# Altium PCB EVB_CBDM_AK376xE_V1.0.1.PcbDoc (part 1 of 2)
Units mil, origin at the board's own origin, x right, y up, seen from the top; angles counter-clockwise.
Board outline 1970 x 2130.01 mil, 4 copper layers (Top, Inner Layer 2, Inner Layer 3, Bottom), stack 35.4 mil thick; 161 components, 161 nets, 664 pads, 636 vias.
Unrouted connection lines stored in the file: 412.
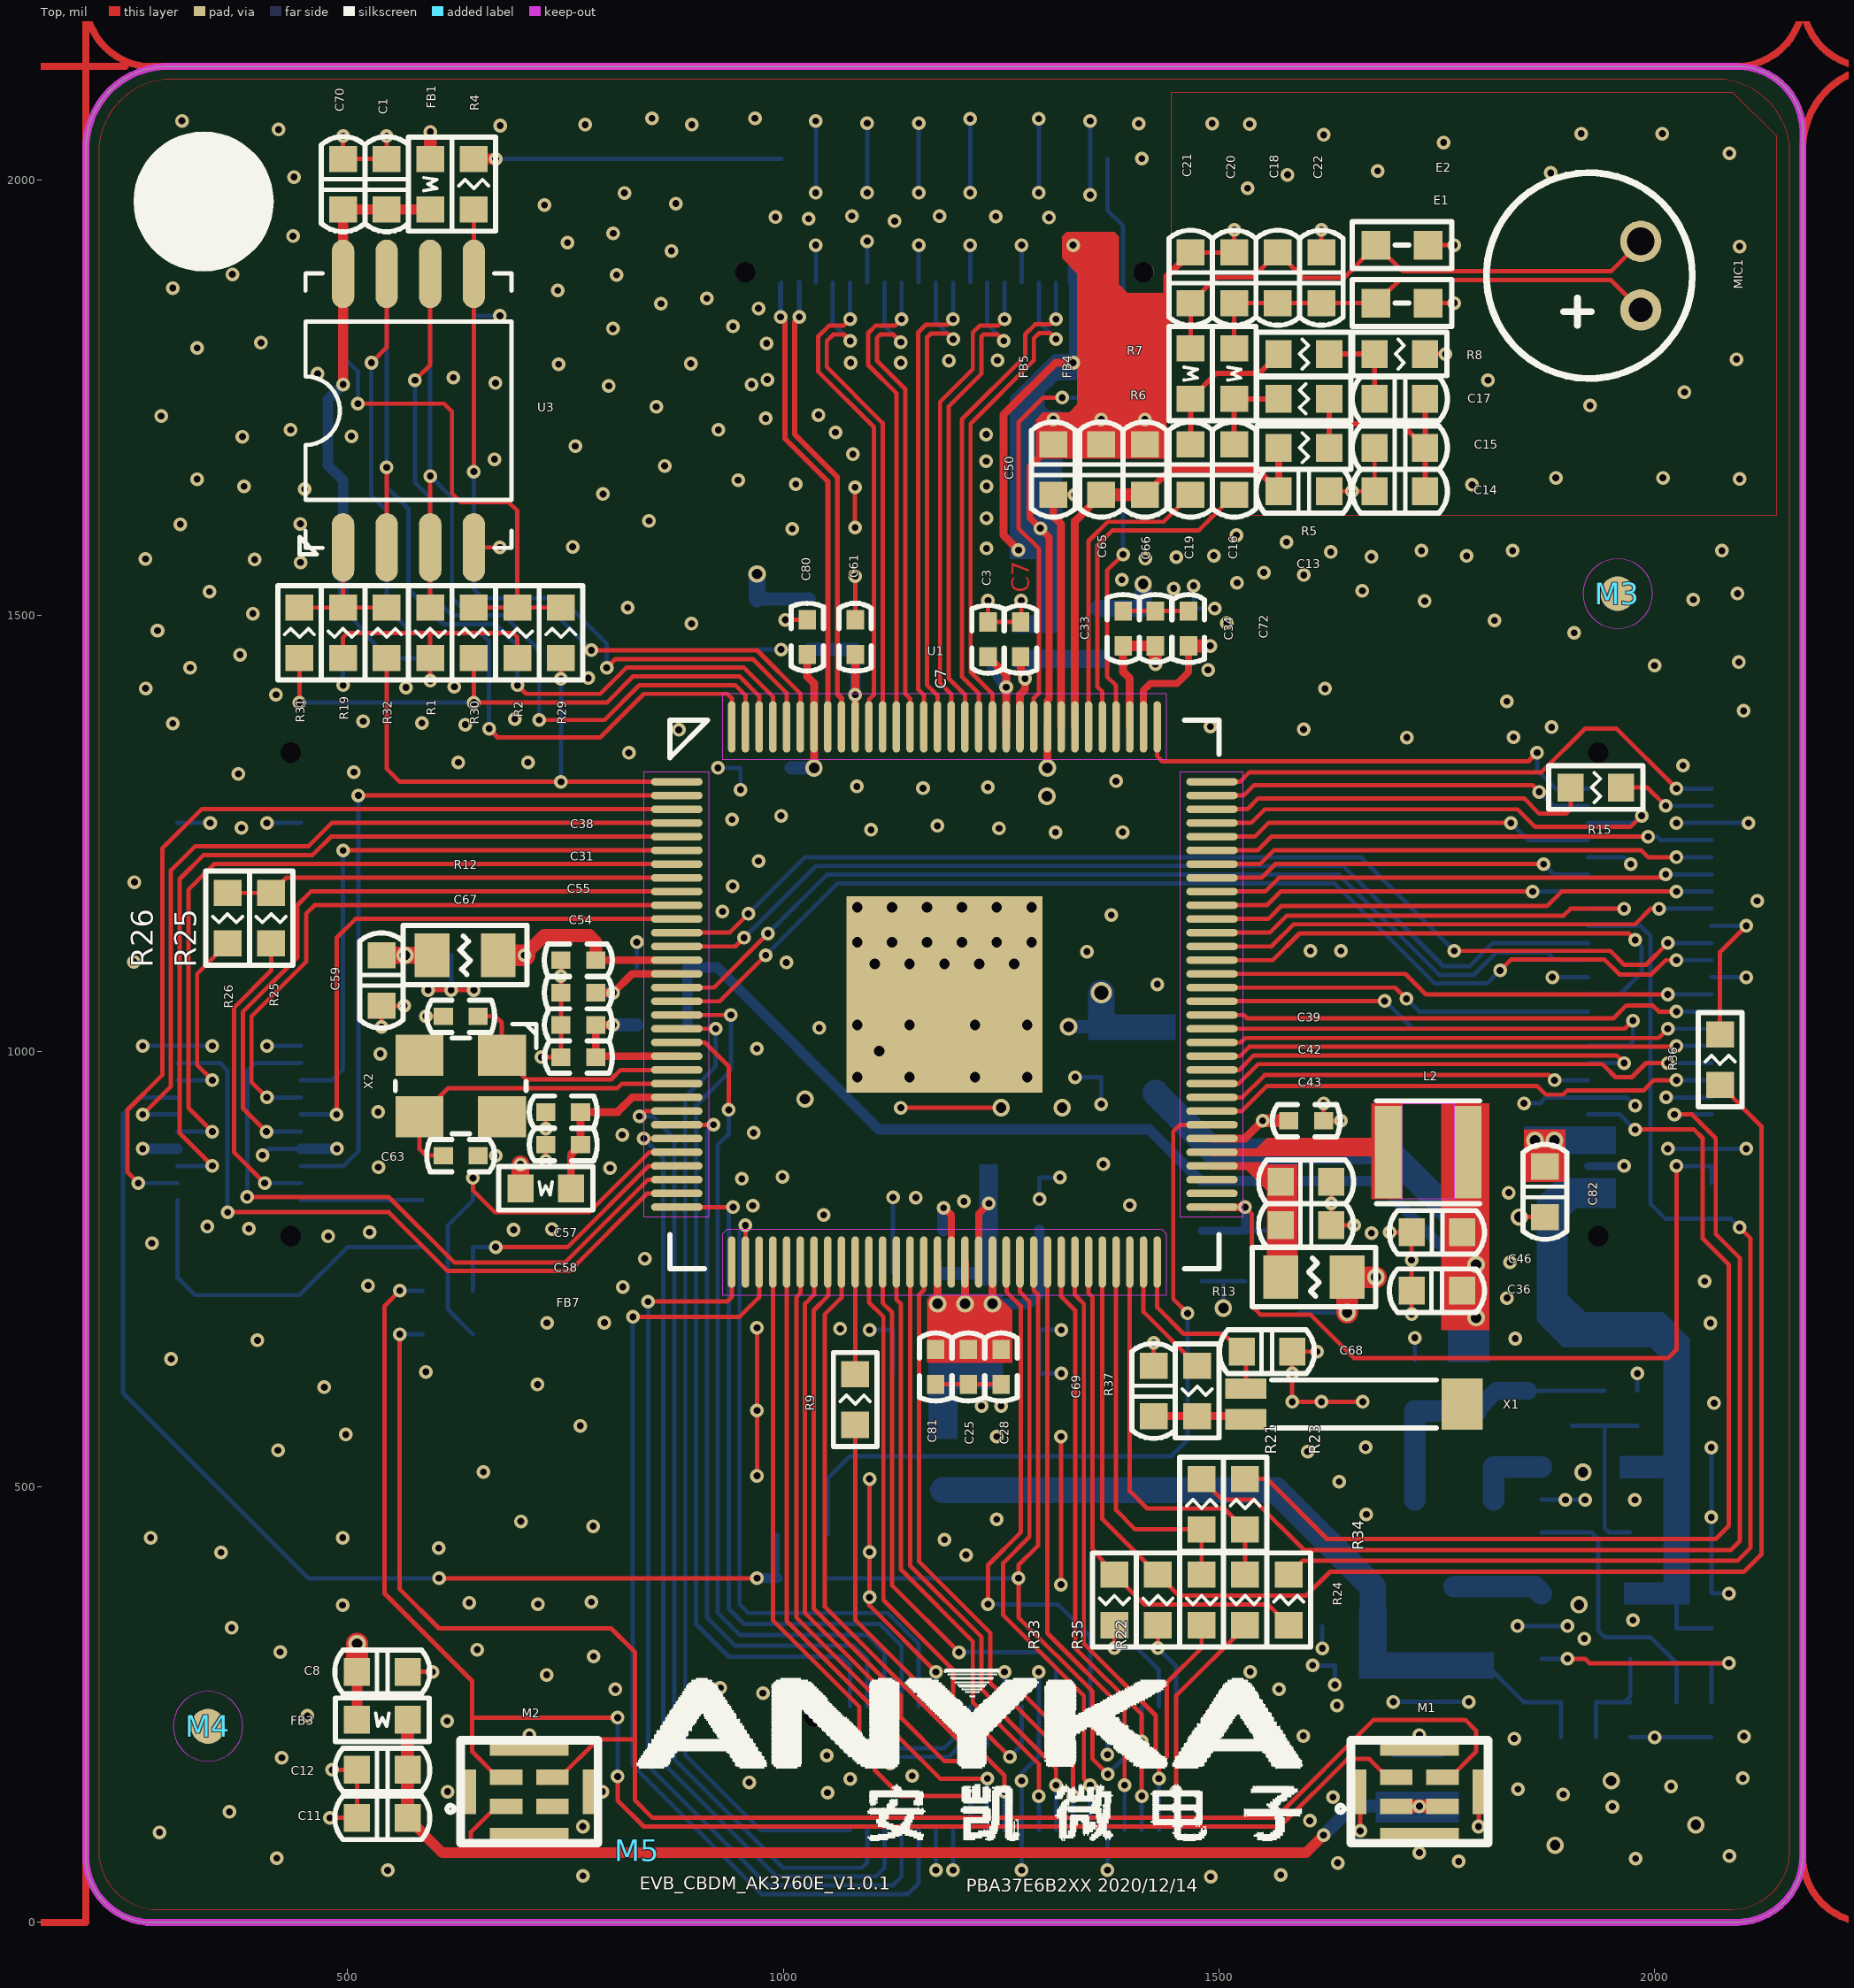
[diagram p0: Top view]
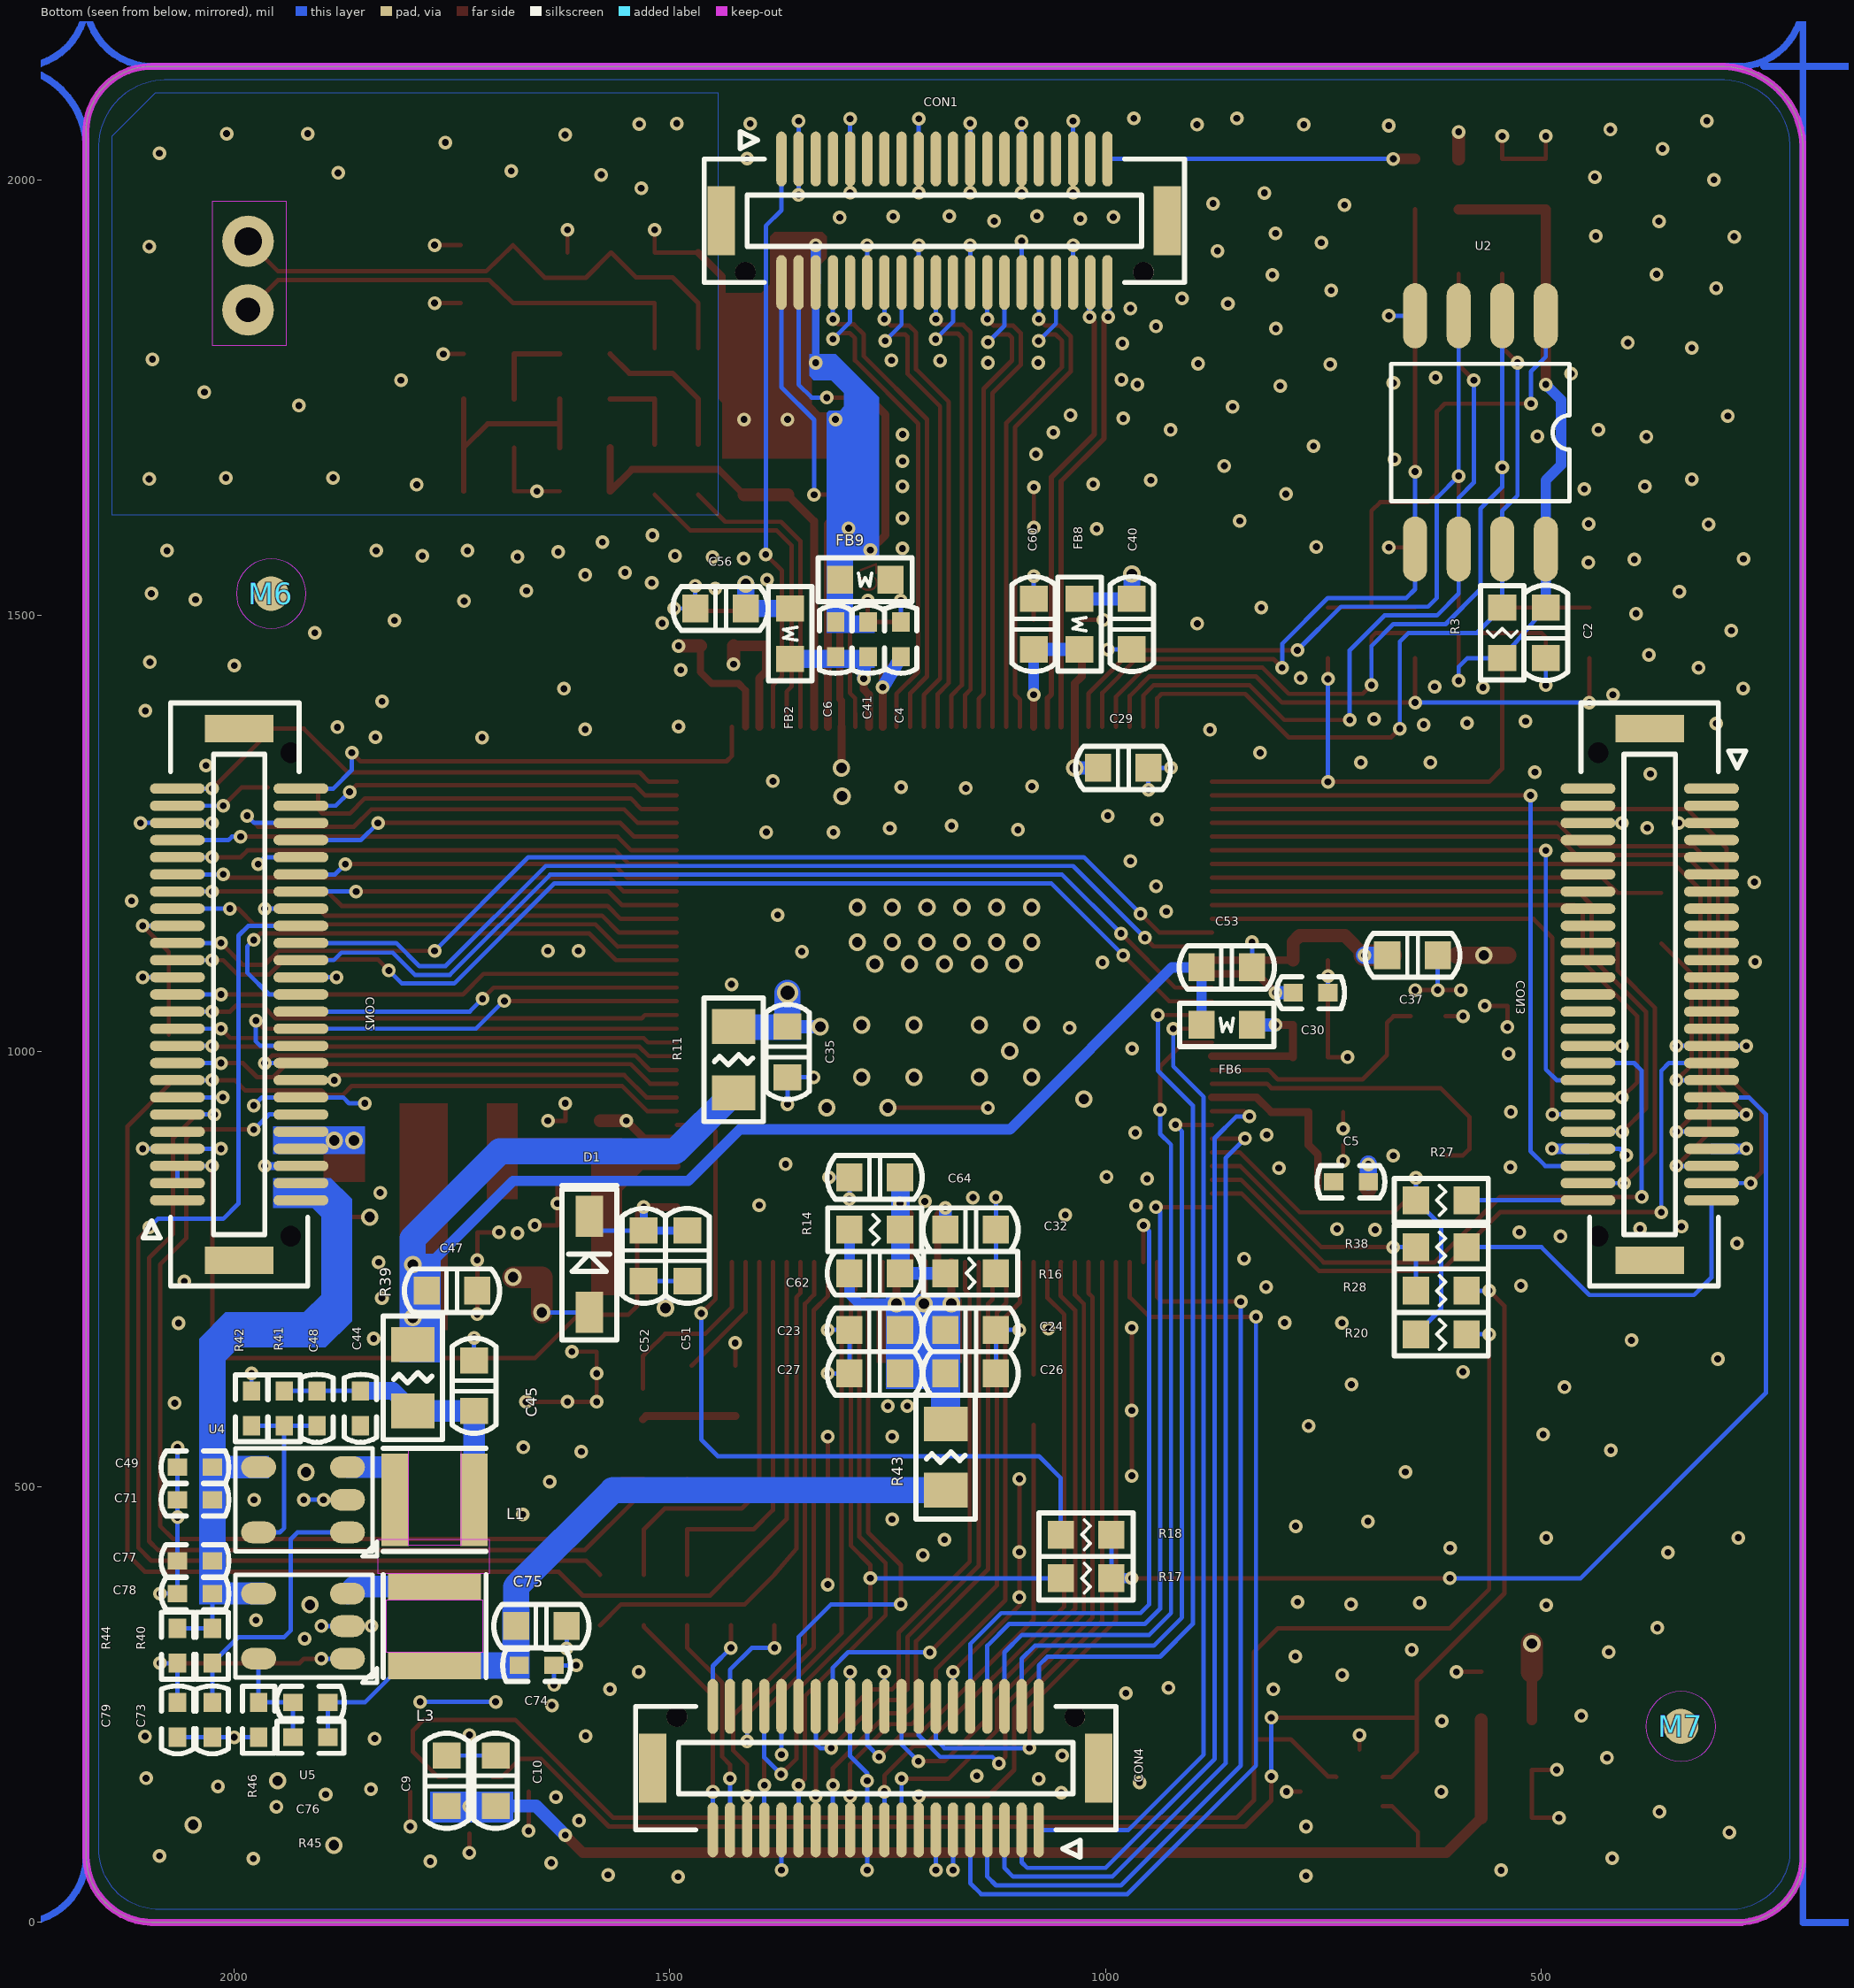
[diagram p1: Bottom view, seen from below]
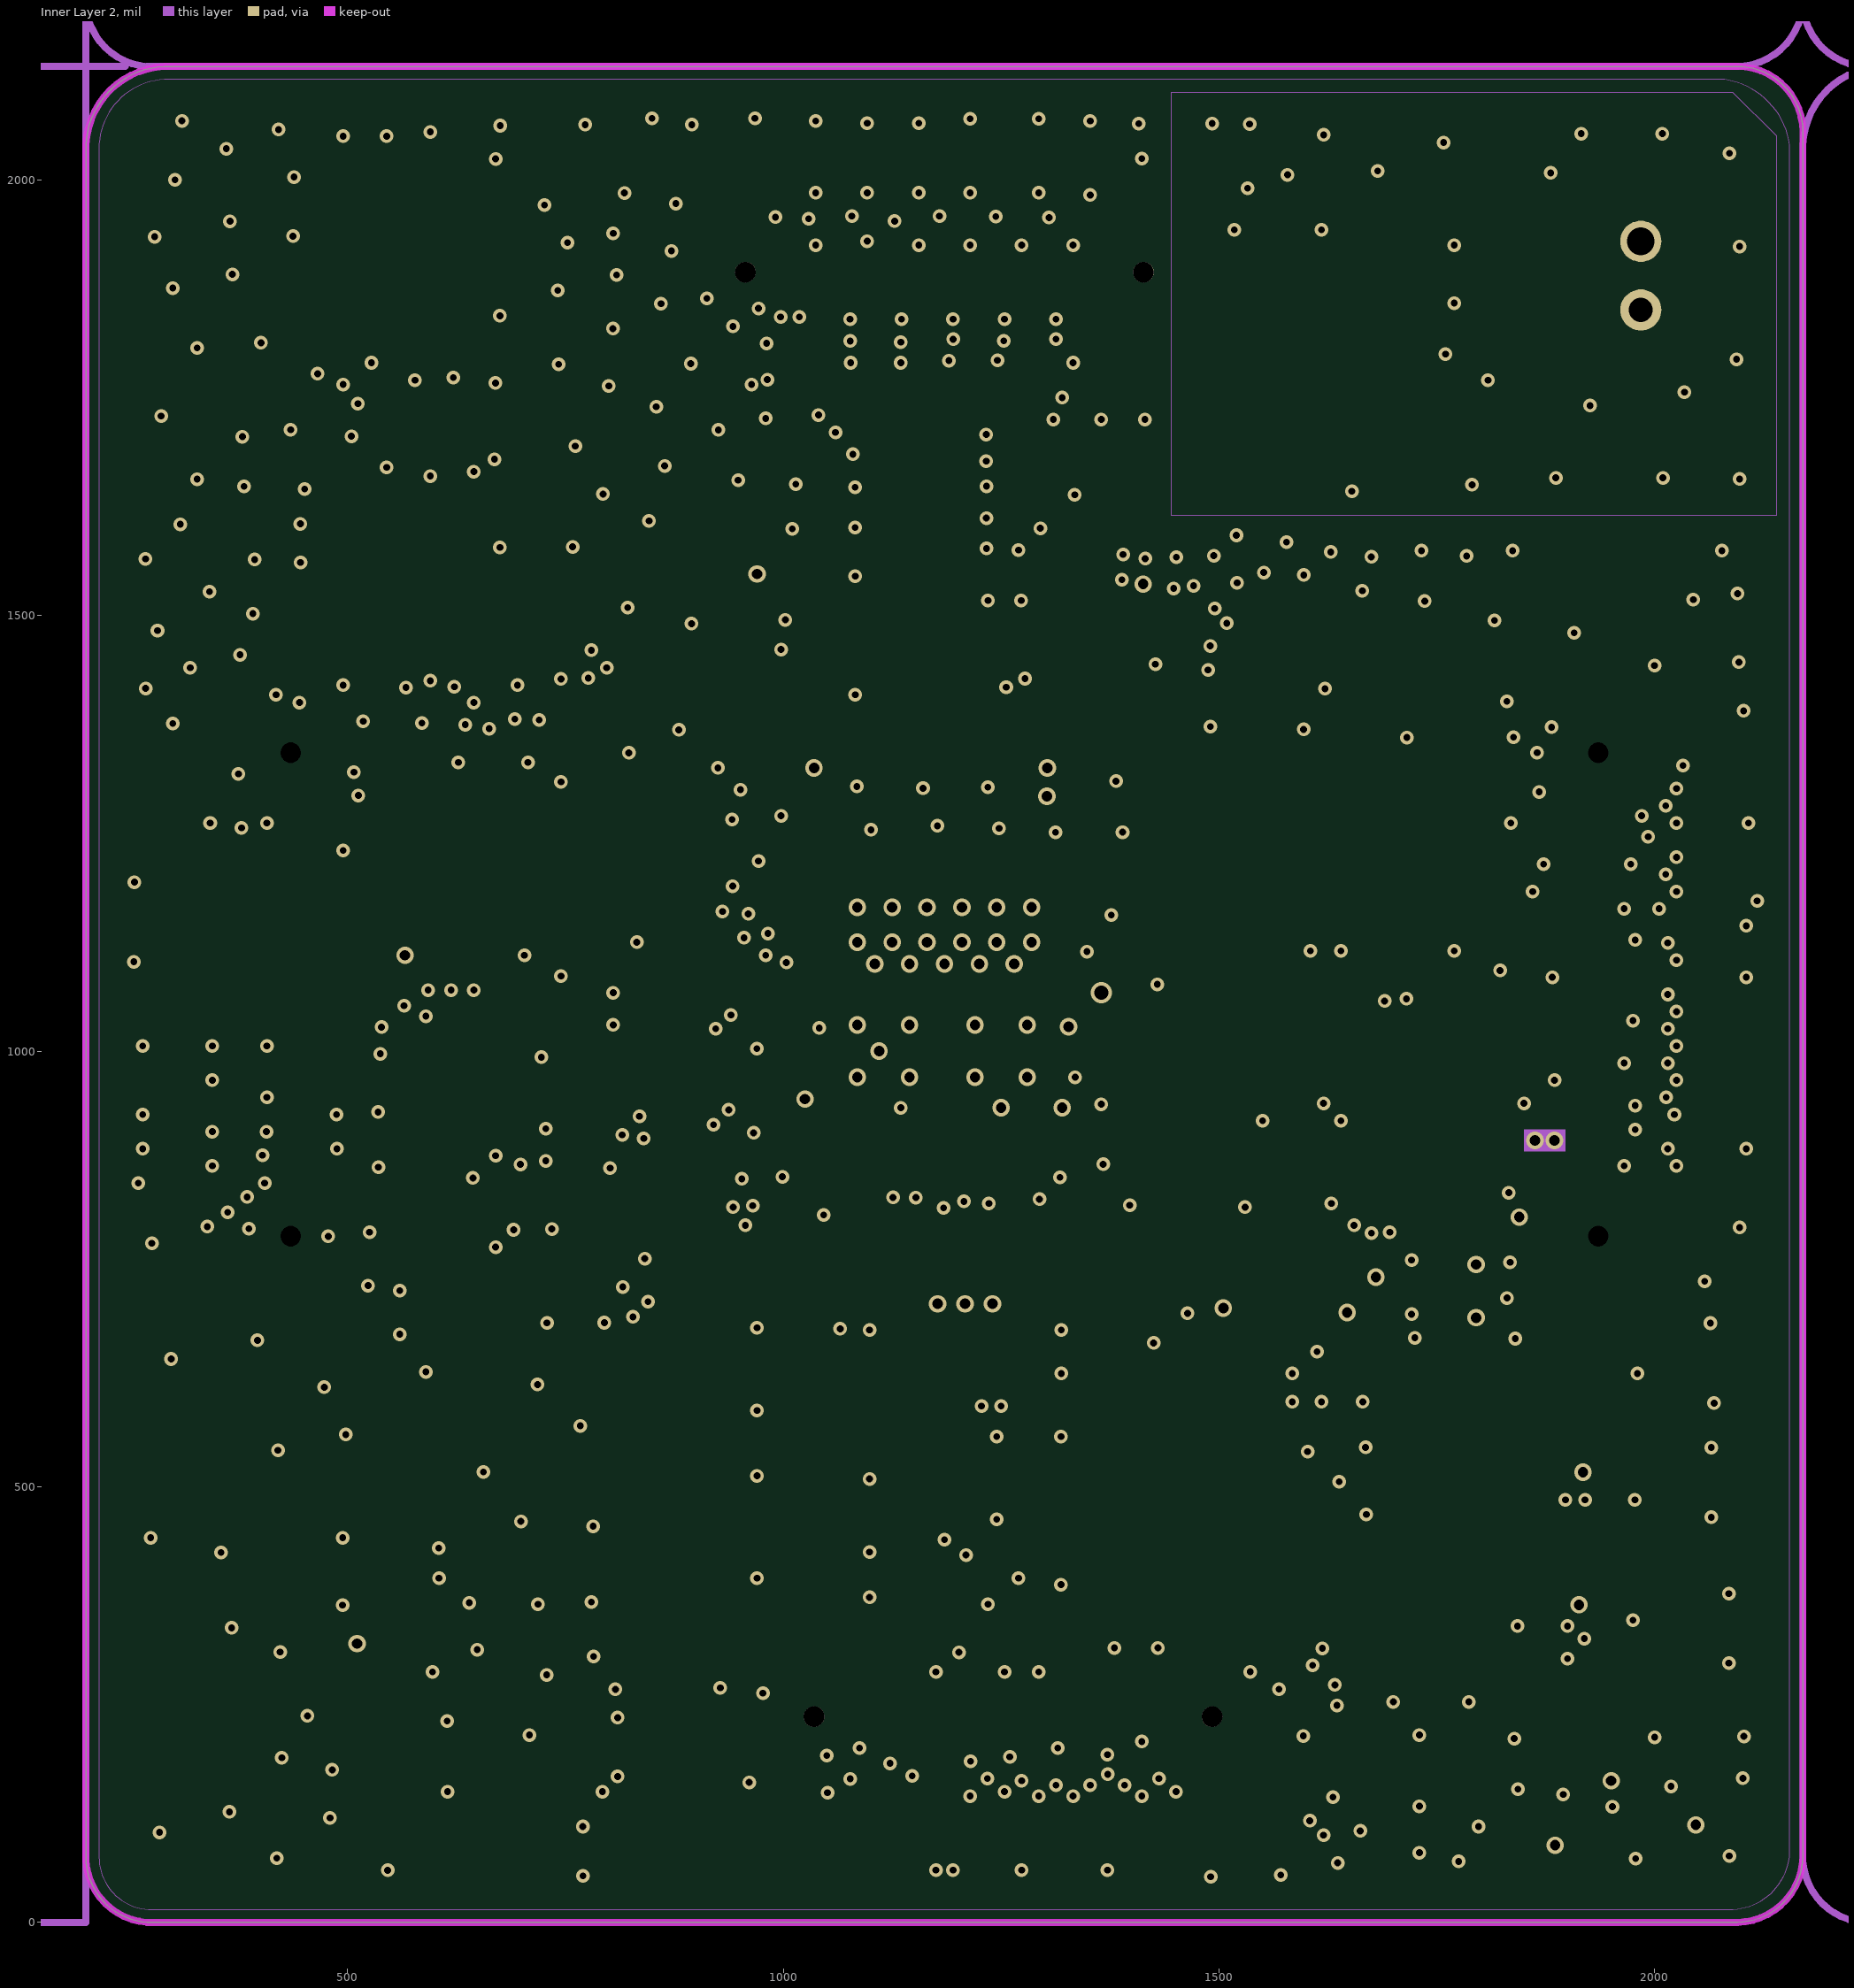
[diagram p2: Inner Layer 2]
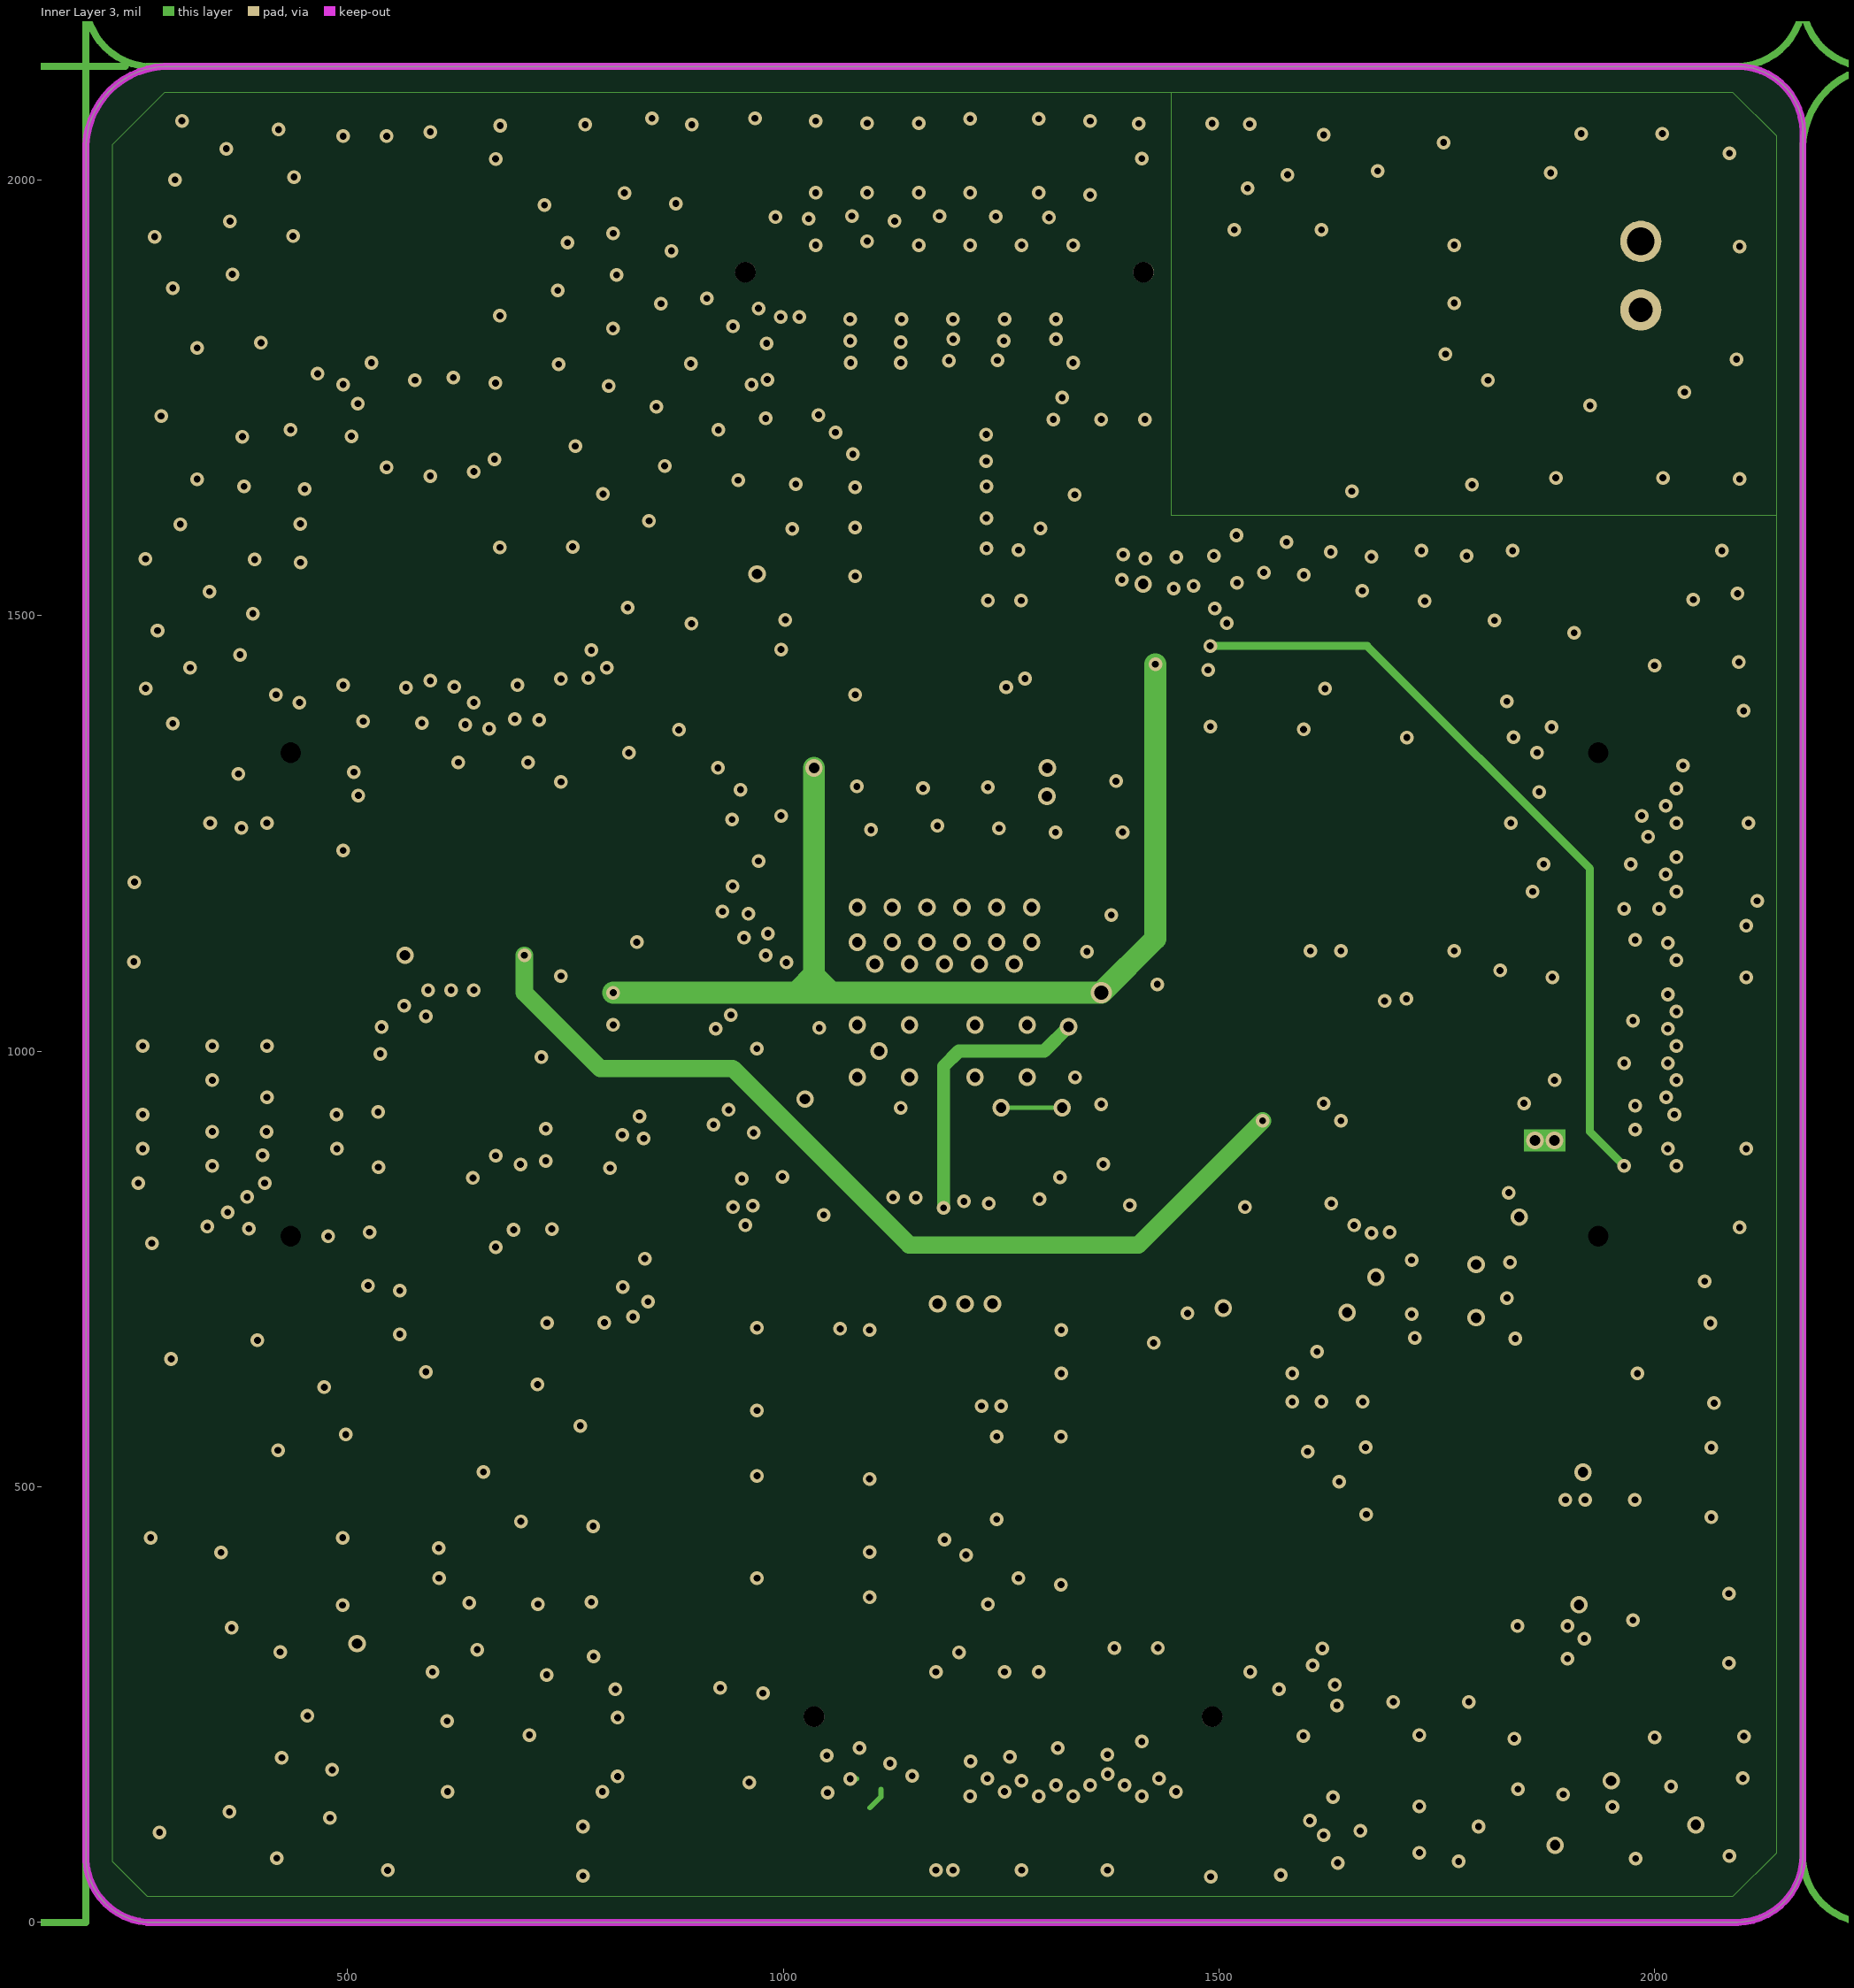
[diagram p3: Inner Layer 3]

## Layer stack, top to bottom
Solder Mask Top: solder mask 0.4, Solder Resist, Dk 3.5
Top: signal copper 1.35
Dielectric 1: dielectric 10, FR-4, Dk 4.3
Inner Layer 2: signal copper 1.35
Dielectric2: dielectric 10, FR-4, Dk 4.3
Inner Layer 3: signal copper 1.35
Dielectric3: dielectric 10, FR-4, Dk 4.3
Bottom: signal copper 1.35
Solder Mask Bottom: solder mask 0.4, Solder Resist, Dk 3.5

## Board outline
200,70 200,69.96 ccw(c275.5,75.5) 270,0 2095,0 2094.94,0 ccw(c2093.33,76.67) 2170,75 2170,2055 ccw(c2095,2055) 2095,2130 290,2130 289.99,2130 ccw(c293.93,2036.07) 200,2040

## Design rules (kind name [scope] priority, off if disabled: settings)
Clearance "Clearance - Default - DEFAULT- SMD" [IsVia vs IsSMTPin] p1: gap=0 ignorepadtopadclearanceinfootprint=FALSE
Clearance "Clearance - Default - DEFAULT - Via" [IsVia vs IsVia] p2: gap=0 ignorepadtopadclearanceinfootprint=FALSE
Clearance "Clearance - Default - DEFAULT - Net" [All] p3: gap=5 ignorepadtopadclearanceinfootprint=FALSE except(0: Arc-Hole Track-Hole SMDPad-Hole THPad-Hole Via-Hole Fill-Hole Poly-Hole Region-Hole Text-Hole; 6: Arc-Fill Arc-Poly Arc-Region Track-Fill Track-Poly Track-Region THPad-Fill THPad-Poly THPad-Region Via-Fill Via-Poly Via-Region Fill-Fill Fill-Poly Fill-Region Poly-Poly Poly-Region Region-Region; 8: SMDPad-Fill SMDPad-Poly SMDPad-Region; 10: Text-Text)
ComponentClearance "ComponentClearance - Default - DEFAULT" [All] p1: gap=0 collisioncheckmode=3 verticalgap=10 showdistances=FALSE
FanoutControl Fanout_Small [(CompPinCount < 5)] p3: bgadir=Out bgaviamode=Centered fanoutstyle=Auto fanoutdirection=OutThenIn viagrid=1 // Fanout_Small (Default Rule)
FanoutControl Fanout_SOIC [IsSOIC] p4: bgadir=Out bgaviamode=Centered fanoutstyle=Auto fanoutdirection=Alternating viagrid=1 // Fanout_SOIC (Default Rule)
HoleToHoleClearance "HoleToHoleClearance - Default - DEFAULT" [All] p1: gap=0 allowstackedmicrovias=TRUE
Length "Default Length" [All] p1: maxlimit=50000 minlimit=0
MaxMinImpedance "Default Impedance" [All] p1: minimum=50.00 maximum=150.0
ParallelSegment "Default Parallel Segment Adjasent" [All] p1: limit=1000 gap=200
ParallelSegment "Default Parallel Segment Same Layer" [All] p2: limit=1000 gap=200
PlaneConnect "Default PlaneConnect" [All] p1: planeconnectstyle=Direct reliefexpansion=20 reliefentries=4 reliefconductorwidth=10 reliefairgap=10
PolygonConnect "PolygonConnect - Default SMT" [IsSMTPin] p1: connectstyle=Direct reliefconductorwidth=10 reliefentries=4 polygonreliefangle="45 Angle" airgapwidth=10
PolygonConnect "PolygonConnect - Default Pad" [All] p2: connectstyle=Direct reliefconductorwidth=10 reliefentries=4 polygonreliefangle="45 Angle" airgapwidth=10
RoutingLayers "RoutingLayers - Default - DEFAULT" [All] p1: top layer_v5=TRUE mid layer 1_v5=TRUE mid layer 2_v5=TRUE bottom layer_v5=TRUE
RoutingPriority "RoutingPriority - Default - DEFAULT" [All] p1: routingpriority=3
RoutingTopology "Default Routing Topology" [All] p1: topology=Shortest
RoutingVias "RoutingVias - Default - DEFAULT" [All] p1: holewidth=7.87 width=15.75 viastyle="Through Hole" minholewidth=7.87 minwidth=15.75 maxholewidth=7.87 maxwidth=15.75
SMDToCorner "SMDToCorner - Default - DEFAULT" [All] p1: distance=0
SolderMaskExpansion [All] p1: expansion=4 istentingtop=FALSE
Width "Default Width" [All] p1: maxlimit=100 minlimit=5 preferedwidth=5
22 further rules are at their usual default settings.

## Classes and differential pairs
component class POWER: C44 C45 C48 C49 C71 C73 C74 C75 C76 C77 C78 C79 L1 L3 R39 R40 R41 R42 R43 R44 R45 R46 U4 U5
component class INTERFACE_CORE: CON1 CON2 CON3 CON4
component class AK376xE_POWER: C23 C24 C25 C26 C27 C28 C29 C30 C31 C32 C33 C34 C35 C36 C37 C38 C39 C40 C42 C43 C46 C47 C50 C51 C52 C53 C54 C55 C56 C57 C58 C59 C60 C61 C62 C63 C64 C65 C66 C67 C68 C69 C80 C81 C82 D1 FB6 FB7 FB8 FB9 L2 R11 R12 R13 R14 R16 R37 U1 X1 X2
component class AK376xE_MIC: C3 C4 C5 C6 C7 C8 C9 C10 C11 C12 C13 C14 C15 C16 C17 C18 C19 C20 C21 C22 C41 E1 E2 FB2 FB3 FB4 FB5 M1 M2 MIC1 R5 R6 R7 R8 R20 R25 R26 R27 R28 R38
component class AK376xE_FLASH: C1 C2 C70 C72 FB1 R1 R2 R3 R4 R9 R15 R17 R18 R19 R21 R22 R23 R24 R29 R30 R31 R32 R33 R34 R35 R36 U2 U3

## Components (designator, comment, footprint, x,y, rotation, side; value= is the part's Value field where it differs from the comment)
C1 "100nF" C0603 545,1995 r90 top
C2 "4.7uF" C0603 495,1480 r90 bottom
C3 "4.7uF" C0402 1235,1472.5 r270 top
C4 "100nF" C0402 1235,1472.5 r270 bottom
C5 "4.7uF" C0402 718.5,850 r180 bottom
C6 "4.7uF" C0402 1310,1472.5 r90 bottom
C7 "100nF" C0402 1272.5,1472.5 r90 top
C8 "4.7uF" C0603 540,287.5 r0 top
C9 "1uF" C0603 1756,162.5 r90 bottom
C10 "100nF" C0603 1700,162.5 r90 bottom
C11 "10uF" C0603 540,120 r180 top
C12 "100nF" C0603 540,175 r180 top
C13 "100pF" C0603 1597.5,1642.5 r0 top
C14 "100pF" C0603 1707.5,1642.5 r180 top
C15 "10uF" C0603 1707.5,1692.5 r180 top
C16 "1uF" C0603 1517.5,1667.5 r90 top
C17 "10uF" C0603 1707.5,1748.5 r180 top
C18 "100pF" C0603 1567.5,1887.5 r90 top
C19 "1uF" C0603 1467.5,1667.5 r90 top
C20 "10pF" C0603 1517.5,1887.5 r90 top
C21 "33pF" C0603 1467.5,1887.5 r90 top
C22 "100nF" C0603 1617.5,1887.5 r90 top
C23 "100nF" C0603 1265,680 r180 bottom
C24 "100nF" C0603 1155,680 r0 bottom
C25 "100nF" C0402 1212.5,637.5 r90 top
C26 "10nF" C0603 1155,630 r0 bottom
C27 "1nF" C0603 1265,630 r180 bottom
C28 "4.7uF" C0402 1250,637.5 r90 top
C29 "100nF" C0603 980,1325 r0 bottom
C30 "100nF" C0402 765,1067 r0 bottom
C31 "100nF" C0402 765,1067 r0 top
C32 "100nF" C0603 1155,795 r0 bottom
C33 "100nF" C0402 1390,1485 r270 top
C34 "1nF" C0402 1427,1485 r270 top
C35 "33pF" C0603 1365,999 r90 bottom
C36 "10uF" C0603 1750,725 r0 top
C37 "100nF" C0603 648,1110 r0 bottom
C38 "100nF" C0402 765,1104.37 r0 top
C39 "100nF" C0402 1600,920 r180 top
C40 "10uF" C0603 970,1490 r90 bottom
C41 "100nF" C0402 1272.5,1472.5 r90 bottom
C42 "4.7uF" C0603 1600,850 r0 top
C43 "100nF" C0603 1600,800 r0 top
C44 "100nF" C0402 1855,590 r270 bottom
C45 "10uF" C0603 1724.72,616 r90 bottom
C46 "10uF" C0603 1750,792 r180 top
C47 "100nF" C0603 1750,725 r180 bottom
C48 "100pF" C0402 1905,590 r270 bottom
C49 "4.7uF" C0402 2045,522.4 r0 bottom
C50 "4.7uF" C0603 1310,1667.5 r90 top
C51 "4.7uF" C0603 1480,765 r270 bottom
C52 "100nF" C0603 1530,765 r270 bottom
C53 "4.7uF" C0603 861,1096 r180 bottom
C54 "4.7uF" C0402 765,993 r180 top
C55 "100nF" C0402 765,1030 r180 top
C56 "4.7uF" C0603 1442,1508 r0 bottom
C57 "4.7uF" C0402 747.5,930 r180 top
C58 "100nF" C0402 747.5,892.5 r180 top
C59 "4.7uF" C0603 539,1081 r270 top
C60 "4.7uF" C0603 1082.64,1490 r90 bottom
C61 "100nF" C0402 1082.64,1475 r90 top
C62 "100nF" C0603 1265,745 r180 bottom
C63 "NC/12pF" C0402 630,880 r0 top
C64 "100nF" C0603 1265,855 r0 bottom
C65 "4.7uF" C0603 1365,1667.5 r90 top
C66 "100nF" C0603 1415,1667.5 r90 top
C67 "NC/12pF" C0402 630,1040 r180 top
C68 "22pF" C0603 1555,655 r0 top
C69 "22pF" C0603 1425,610 r90 top
C70 "100nF" C0603 495,1995 r90 top
C71 "100nF" C0402 2045,485 r0 bottom
C72 "100nF" C0402 1465,1485 r90 top
C73 "NC/100nF" C0402 2025,232.5 r270 bottom
C74 "100nF" C0402 1653,295 r180 bottom
C75 "10uF" C0603 1647.5,340 r180 bottom
C76 "100pF" C0402 1912.5,252.5 r0 bottom
C77 "4.7uF" C0402 2045,415 r0 bottom
C78 "100nF" C0402 2045,377.4 r0 bottom
C79 "NC/100nF" C0402 2065,232.5 r270 bottom
C80 "100nF" C0402 1027.5,1475 r270 top
C81 "100nF" C0402 1175,637.5 r90 top
C82 "10uF" C0603 1874,838.5 r90 top
CON1 "CON20X2_0MM5_BTB_DF12" CON20X2_0MM5_BTB_DF12_N 1185,1952.99 r0 bottom
CON2 "CON25X2_0MM5_BTB_DF12" CON25X2_0MM5_BTB_DF12_N 1994.25,1065 r270 bottom
CON3 "CON25X2_0MM5_BTB_DF12" CON25X2_0MM5_BTB_DF12_N 375.75,1065 r90 bottom
CON4 "CON20X2_0MM5_BTB_DF12" CON20X2_0MM5_BTB_DF12_N 1263.74,177.01 r180 bottom
D1 "1N5819_SOD123" FileName=\\172.10.10.37\部门文件夹\系统平台研发中心\系统硬件部\AD_Library\\AD_Footprint.PcbLib#1 1592.5,755.12 r90 bottom
E1 "ESD0603" ESD0603 1710,1858.5 r0 top value=NP/0603ESDA-MLP
E2 "ESD0603" ESD0603 1710,1925 r0 top value=NP/0603ESDA-MLP
FB1 "100M/300R" FB0603 595,1995 r90 top
FB2 "600R/100MHz" FB0603 1362,1479 r270 bottom
FB3 "600R/100MHz" FB0603 540,232.5 r0 top
FB4 "600R/100MHz" FB0603 1517.5,1777.5 r90 top
FB5 "600R/100MHz" FB0603 1467.5,1777.5 r90 top
FB6 "600R/100MHz" FB0603 861,1030 r180 bottom
FB7 "600R/100MHz" FB0603 727.5,842.5 r0 top
FB8 "600R/100MHz" FB0603 1030,1490 r270 bottom
FB9 "600R/100MHz" FB0603 1276,1541 r180 bottom
L1 "4.7uH,SWPA3012S4R7MT" L_SWPA3012_3X3MM 1770,485 r180 bottom value=4.7uH,SWPA3012S2R2MT
L2 "4.7uH" L_SWPA3012_3X3MM 1740,883.9 r0 top value=4.7uH,SWPA3012S2R2MT
L3 "4.7uH,SWPA3012S4R7MT" L_SWPA3012_3X3MM 1770,340 r270 bottom value=4.7uH,SWPA3012S2R2MT
M1 "MSM261D4030H1CPM" MSM261D4030H1 1730,150 r90 top
M2 "MSM261D4030H1CPM" MSM261D4030H1 708.72,150 r90 top
M3 "FIDU_40" FIDU_40 1957.5,1525 r0 top
M4 "FIDU_40" FIDU_40 340,225 r0 top
M5 "AK2020_LOGO" AK2020_LOGO 832.5,82.5 r0 top
M6 "FIDU_40" FIDU_40 1957.5,1525 r180 bottom
M7 "FIDU_40" FIDU_40 340,225 r180 bottom
MIC1 "MIC_6027" FileName=\\172.10.10.37\部门文件夹\系统平台研发中心\系统硬件部\AD_Library\\AD_Footprint.PcbLib#2 1925,1890 r270 top
R1 "4.7K" R0603 595,1480 r90 top
R2 "4.7K" R0603 695,1480 r90 top
R3 "4.7K" R0603 545,1480 r90 bottom
R4 "100R" R0603 645,1995 r270 top
R5 "1K" R0603 1597.5,1692.5 r180 top
R6 "1.2K" R0603 1597.5,1748.5 r0 top
R7 "1.2K" R0603 1597.5,1800 r180 top
R8 "1K" R0603 1707.5,1800 r180 top
R9 "33R" R0603 1082.64,600 r270 top
R11 "0R" R0805 1427,990 r90 bottom
R12 "0R" R0805 635,1110 r0 top
R13 "0R" R0805 1609,740.5 r0 top
R14 "10K" R0603 1265,795 r0 bottom
R15 "33R" R0603 1932.5,1302.5 r180 top
R16 "10K" R0603 1155,745 r0 bottom
R17 "NC/1K" R0603 1022.5,395 r0 bottom
R18 "0R" R0603 1022.5,445 r0 bottom
R19 "4.7K" R0603 495,1480 r90 top
R20 "0R" R0603 615,675 r0 bottom
R21 "0R" R0603 1480,480 r270 top
R22 "NC/0R" R0603 1480,370 r90 top
R23 "0R" R0603 1530,480 r270 top
R24 "NC/0R" R0603 1530,370 r90 top
R25 "0R" R0603 412.5,1152.5 r90 top
R26 "NC/0R" R0603 362.5,1152.5 r90 top
R27 "NC/0R" R0603 615,828.78 r0 bottom
R28 "0R" R0603 615,725 r0 bottom
R29 "NC/0R" R0603 745,1480 r270 top
R30 "0R" R0603 645,1480 r270 top
R31 "NC/0R" R0603 445,1480 r270 top
R32 "0R" R0603 545,1480 r270 top
R33 "0R" R0603 1380,370 r90 top
R34 "NC/0R" R0603 1580,370 r270 top
R35 "0R" R0603 1430,370 r90 top
R36 "NC/0R" R0603 2075,990 r270 top
R37 "30K" R0603 1475,610 r90 top
R38 "NC/0R" R0603 615,775 r0 bottom
R39 "NC/0R" R0805 1795,625 r270 bottom
R40 "100K" R0402 2025,317.5 r90 bottom
R41 "120K" R0402 1942.5,590 r90 bottom
R42 "110K" R0402 1980,590 r270 bottom
R43 "0R" R0805 1183.5,534 r270 bottom
R44 "100K" R0402 2065,317.5 r90 bottom
R45 "200K" R0402 1912.5,212.5 r180 bottom
R46 "100K" R0402 1971.97,232.5 r90 bottom
U1 "AK376xE" FileName=\\172.10.10.37\部门文件夹\系统平台研发中心\系统硬件部\AD_Library\\AD_Footprint.PcbLib#3 1185,1065 r0 top
U2 "GD25Q64ESIG" GD25Q64ESIG_SOP8_1MM27_5X8MM 570,1710 r0 bottom
U3 "GD5F1GQ5UEYIG" GD5F1GQ5UEYIG_SOP8_1MM27_6X8MM 570,1735 r0 top
U4 "PAM2312_SOT23_5" FileName=\\172.10.10.37\部门文件夹\系统平台研发中心\系统硬件部\AD_Library\\AD_Footprint.PcbLib#4 1920,485 r90 bottom
U5 "PAM2312_SOT23_5" FileName=\\172.10.10.37\部门文件夹\系统平台研发中心\系统硬件部\AD_Library\\AD_Footprint.PcbLib#4 1920,340 r90 bottom
X1 "32.768K" MC146 1655,595 r270 top
X2 "24M,CL=10PF,+/-10ppm,3225" FileName=\\172.10.10.37\部门文件夹\系统平台研发中心\系统硬件部\AD_Library\\AD_Footprint.PcbLib#5 630,960 r180 top

## Footprints (in the part's own frame and the unit in brackets; to place one, negate y for a bottom-side part, rotate by r counter-clockwise, add the part's x,y. Pads: shape width x height; smd on the part's side, far side on the other; paste and mask are expansions set on the pad)
AK2020_LOGO [mil]
  silkscreen extent 0,12 764,208
C0402 [mil]
  rect 22x20 smd: 1(-20,0) 2(20,0)
  silkscreen extent -39,-19 39,19
C0603 [mil]
  rect 30x32 smd: 1(-29,0) 2(29,0)
  silkscreen extent -55,-25 55,25
CON20X2_0MM5_BTB_DF12_N [mm]
  oval 0.3x1.6 smd: 1(4.75,-1.8) 2(4.75,1.8) 3(4.25,-1.8) 4(4.25,1.8) 5(3.75,-1.8) 6(3.75,1.8) 7(3.25,-1.8) 8(3.25,1.8) 9(2.75,-1.8) 10(2.75,1.8) 11(2.25,-1.8) 12(2.25,1.8) 13(1.75,-1.8) 14(1.75,1.8) 15(1.25,-1.8) 16(1.25,1.8) 17(0.75,-1.8) 18(0.75,1.8) 19(0.25,-1.8) 20(0.25,1.8) 21(-0.25,-1.8) 22(-0.25,1.8) 23(-0.75,-1.8) 24(-0.75,1.8) 25(-1.25,-1.8) 26(-1.25,1.8) 27(-1.75,-1.8) 28(-1.75,1.8) 29(-2.25,-1.8) 30(-2.25,1.8) 31(-2.75,-1.8) 32(-2.75,1.8) 33(-3.25,-1.8) 34(-3.25,1.8) 35(-3.75,-1.8) 36(-3.75,1.8) 37(-4.25,-1.8) 38(-4.25,1.8) 39(-4.75,-1.8) 40(-4.75,1.8)
  rect 0.8x2 smd: 41(-6.5,0) 42(6.5,0)
  round 0.6 hole 0.6 unplated: 43(-5.8,1.5) 44(5.8,1.5)
  silkscreen extent -7,-2.6 7,1.8
CON25X2_0MM5_BTB_DF12_N [mm]
  oval 0.3x1.6 smd: 1(6,-1.8) 2(6,1.8) 3(5.5,-1.8) 4(5.5,1.8) 5(5,-1.8) 6(5,1.8) 7(4.5,-1.8) 8(4.5,1.8) 9(4,-1.8) 10(4,1.8) 11(3.5,-1.8) 12(3.5,1.8) 13(3,-1.8) 14(3,1.8) 15(2.5,-1.8) 16(2.5,1.8) 17(2,-1.8) 18(2,1.8) 19(1.5,-1.8) 20(1.5,1.8) 21(1,-1.8) 22(1,1.8) 23(0.5,-1.8) 24(0.5,1.8) 25(0,-1.8) 26(0,1.8) 27(-0.5,-1.8) 28(-0.5,1.8) 29(-1,-1.8) 30(-1,1.8) 31(-1.5,-1.8) 32(-1.5,1.8) 33(-2,-1.8) 34(-2,1.8) 35(-2.5,-1.8) 36(-2.5,1.8) 37(-3,-1.8) 38(-3,1.8) 39(-3.5,-1.8) 40(-3.5,1.8) 41(-4,-1.8) 42(-4,1.8) 43(-4.5,-1.8) 44(-4.5,1.8) 45(-5,-1.8) 46(-5,1.8) 47(-5.5,-1.8) 48(-5.5,1.8) 49(-6,-1.8) 50(-6,1.8)
  rect 0.8x2 smd: 51(-7.75,0) 52(7.75,0)
  round 0 hole 0.6 unplated: 53(-7.05,1.5) 54(7.05,1.5)
  silkscreen extent -8.5,-2.8 8.5,2
ESD0603 [mil]
  rect 33x33 smd: 1(-30,0) 2(30,0)
  silkscreen extent -57,-27 57,27
FB0603 [mil]
  rect 30x32 smd: 1(-29,0) 2(29,0)
  silkscreen extent -54,-25 54,25
FIDU_40 [mil]
  round 40 smd: 1(0,0)
  Top keep-out region: 40,0 36.96,15.31 28.28,28.28 15.31,36.96 0,40 0,40 -15.31,36.96 -28.28,28.28 -36.96,15.31 -40,0 -40,0 -36.96,-15.31 -28.28,-28.28 -15.31,-36.96 0,-40 0,-40 15.31,-36.96 28.28,-28.28 36.96,-15.31 40,0
FileName=\\172.10.10.37\部门文件夹\系统平台研发中心\系统硬件部\AD_Library\\AD_Footprint.PcbLib#1 [mm]
  rect 1.2x0.8 smd: A(-1.4,0) K(1.4,0)
  silkscreen extent -2.2,-0.8 2.3,0.8
FileName=\\172.10.10.37\部门文件夹\系统平台研发中心\系统硬件部\AD_Library\\AD_Footprint.PcbLib#2 [mm]
  round 1.2 / inner round 1.2 / far side round 1.5 hole 0.7: 1(1,1.5)
  round 1.2 / inner round 1.2 / far side round 1.5 hole 0.8: 2(-1,1.5)
  silkscreen extent -3,-3 3,3
FileName=\\172.10.10.37\部门文件夹\系统平台研发中心\系统硬件部\AD_Library\\AD_Footprint.PcbLib#3 [mm]
  oval 1.5x0.22 smd: 1(-7.8,6.2) 2(-7.8,5.8) 3(-7.8,5.4) 4(-7.8,5) 5(-7.8,4.6) 6(-7.8,4.2) 7(-7.8,3.8) 8(-7.8,3.4) 9(-7.8,3) 10(-7.8,2.6) 11(-7.8,2.2) 12(-7.8,1.8) 13(-7.8,1.4) 14(-7.8,1) 15(-7.8,0.6) 16(-7.8,0.2) 17(-7.8,-0.2) 18(-7.8,-0.6) 19(-7.8,-1) 20(-7.8,-1.4) 21(-7.8,-1.8) 22(-7.8,-2.2) 23(-7.8,-2.6) 24(-7.8,-3) 25(-7.8,-3.4) 26(-7.8,-3.8) 27(-7.8,-4.2) 28(-7.8,-4.6) 29(-7.8,-5) 30(-7.8,-5.4) 31(-7.8,-5.8) 32(-7.8,-6.2) 65(7.8,-6.2) 66(7.8,-5.8) 67(7.8,-5.4) 68(7.8,-5) 69(7.8,-4.6) 70(7.8,-4.2) 71(7.8,-3.8) 72(7.8,-3.4) 73(7.8,-3) 74(7.8,-2.6) 75(7.8,-2.2) 76(7.8,-1.8) 77(7.8,-1.4) 78(7.8,-1) 79(7.8,-0.6) 80(7.8,-0.2) 81(7.8,0.2) 82(7.8,0.6) 83(7.8,1) 84(7.8,1.4) 85(7.8,1.8) 86(7.8,2.2) 87(7.8,2.6) 88(7.8,3) 89(7.8,3.4) 90(7.8,3.8) 91(7.8,4.2) 92(7.8,4.6) 93(7.8,5) 94(7.8,5.4) 95(7.8,5.8) 96(7.8,6.2)
  oval 0.22x1.5 smd: 33(-6.2,-7.8) 34(-5.8,-7.8) 35(-5.4,-7.8) 36(-5,-7.8) 37(-4.6,-7.8) 38(-4.2,-7.8) 39(-3.8,-7.8) 40(-3.4,-7.8) 41(-3,-7.8) 42(-2.6,-7.8) 43(-2.2,-7.8) 44(-1.8,-7.8) 45(-1.4,-7.8) 46(-1,-7.8) 47(-0.6,-7.8) 48(-0.2,-7.8) 49(0.2,-7.8) 50(0.6,-7.8) 51(1,-7.8) 52(1.4,-7.8) 53(1.8,-7.8) 54(2.2,-7.8) 55(2.6,-7.8) 56(3,-7.8) 57(3.4,-7.8) 58(3.8,-7.8) 59(4.2,-7.8) 60(4.6,-7.8) 61(5,-7.8) 62(5.4,-7.8) 63(5.8,-7.8) 64(6.2,-7.8) 97(6.2,7.8) 98(5.8,7.8) 99(5.4,7.8) 100(5,7.8) 101(4.6,7.8) 102(4.2,7.8) 103(3.8,7.8) 104(3.4,7.8) 105(3,7.8) 106(2.6,7.8) 107(2.2,7.8) 108(1.8,7.8) 109(1.4,7.8) 110(1,7.8) 111(0.6,7.8) 112(0.2,7.8) 113(-0.2,7.8) 114(-0.6,7.8) 115(-1,7.8) 116(-1.4,7.8) 117(-1.8,7.8) 118(-2.2,7.8) 119(-2.6,7.8) 120(-3,7.8) 121(-3.4,7.8) 122(-3.8,7.8) 123(-4.2,7.8) 124(-4.6,7.8) 125(-5,7.8) 126(-5.4,7.8) 127(-5.8,7.8) 128(-6.2,7.8)
  rect 5.72x5.72 smd: 129(0,0)
  silkscreen extent -8,-8 8,8
FileName=\\172.10.10.37\部门文件夹\系统平台研发中心\系统硬件部\AD_Library\\AD_Footprint.PcbLib#4 [mm]
  oval 0.635x1.016 smd: 1(-0.95,-1.27) 2(0,-1.27) 3(0.95,-1.27) 4(0.95,1.32) 5(-0.95,1.32)
  silkscreen extent -1.65,-2.13 1.5,2
FileName=\\172.10.10.37\部门文件夹\系统平台研发中心\系统硬件部\AD_Library\\AD_Footprint.PcbLib#5 [mm]
  rect 1.4x1.199 smd: 1(-1.2,-0.9) 2(1.2,-0.9) 3(1.2,0.9) 4(-1.2,0.9)
  silkscreen extent -2.2,-1.8 1.91,1.4
GD5F1GQ5UEYIG_SOP8_1MM27_6X8MM [mm]
  oval 0.65x2 smd: 1(-1.905,-3.988) 2(-0.635,-3.988) 3(0.635,-3.988) 4(1.905,-3.988) 5(1.905,3.988) 6(0.635,3.988) 7(-0.635,3.988) 8(-1.905,3.988)
  silkscreen extent -3.17,-4.19 3,4
GD25Q64ESIG_SOP8_1MM27_5X8MM [mm]
  oval 0.7x1.9 smd: 1(-1.905,-3.4) 2(-0.635,-3.4) 3(0.635,-3.4) 4(1.905,-3.4) 5(1.905,3.4) 6(0.635,3.4) 7(-0.635,3.4) 8(-1.905,3.4)
  silkscreen extent -2.6,-2 2.6,2
L_SWPA3012_3X3MM [mm]
  rect 0.8x2.7 smd: 1(-1.15,0) 2(1.15,0)
  silkscreen extent -1.5,-1.5 1.5,1.5
MC146 [mil]
  rect 23.6x47.2 smd: 1(-17.72,-124.02) 2(17.72,-124.02)
  rect 59.1x47.2 smd: 3(0,124.02)
  silkscreen extent -28,-94 28,94
MSM261D4030H1 [mm]
  rect 0.45x0.95 smd: 1(-0.425,0.675) 2(-0.425,-0.675) 3(0.425,-0.675) 4(0.425,0.675)
  rect 1.3x0.35 smd: 5(0,-1.725) 7(0,1.725)
  rect 0.35x2.3 smd: 6(-1.225,0) 8(1.225,0)
  silkscreen extent -1.5,-2 1.5,2.4
R0402 [mil]
  rect 22x20 smd: 1(-20,0) 2(20,0)
  silkscreen extent -38,-19 38,19
R0603 [mil]
  rect 30x32 smd: 1(-29,0) 2(29,0)
  silkscreen extent -54,-25 54,25
R0805 [mil]
  rect 40x50 smd: 1(-38,0) 2(38,0)
  silkscreen extent -71,-34 71,34

## Part data
C1 C10 C12 C22 C23 C24 C29 C32 C37 C43 C47 C52 C62 C64 C66 C70: library part CC0301040XX, "C/C,100nF,25V,+/-5%,0603", Catalog=陶瓷电容, Part Number=CC0301040XX
C2 C8 C42 C50 C51 C53 C56 C59 C60 C65: library part CC0304751XX, "C/C,4.7uF,16V,+/-10%,0603", Catalog=陶瓷电容, Part Number=CC0304751XX
C3 C5 C6 C28 C49 C54 C57 C77: library part CC0204751XX, "C/C,4.7uF,10V,+/-10%,0402", Catalog=陶瓷电容, Part Number=CC0204751XX
C4 C7 C25 C30 C31 C33 C38 C39 C41 C44 C55 C58 C61 C71 C72 C73 C74 C78 C79 C80 C81: library part CC0201040XX, "C/C,100nF,25V,+/-5%,0402", Catalog=陶瓷电容, Part Number=CC0201040XX
  C73 C79: Remark=NC
C9 C16 C19: library part CC0301055XX, "C/C,1uF,16V,+/-10%,0603", Catalog=陶瓷电容, Part Number=CC0301055XX
C11 C15 C17 C36 C40 C46 C82: library part CC0301061XX, "C/C,10uF,25V,+/-20%,0603", Catalog=陶瓷电容, Part Number=CC0301061XX
C13 C14 C18: library part CC0301010XX, "C/C,100pF,25V,+/-5%,0603", Catalog=陶瓷电容, Part Number=CC0301010XX
C20: library part CC0301000XX, "C/C,10pF,25V,+/-5%,0603", Catalog=陶瓷电容, Part Number=CC0301000XX
C21 C35: library part CC0303300XX, "C/C,33pF,25V,+/-5%,0603", Catalog=陶瓷电容, Part Number=CC0303300XX
C26: library part CC0301032XX, "C/C,10nF,50V,+/-10%,0603", Catalog=陶瓷电容, Part Number=CC0301032XX
C27: library part CC0301020XX, "C/C,1nF,25V,+/-5%,0603", Catalog=陶瓷电容, Part Number=CC0301020XX
C34: library part CC0201020XX, "C/C,1nF,25V,+/-5%,0402", Catalog=陶瓷电容, Part Number=CC0201020XX
C45 C75: library part CC0301064XX, "C/C,10uF,6.3V,+/-20%,0603", Catalog=陶瓷电容, Part Number=CC0301064XX
C48 C76: library part CC0201010XX, "C/C,100pF,25V,+/-5%,0402", Catalog=陶瓷电容, Part Number=CC0201010XX
C63 C67: library part CC02012R0XX, "C/C,12pF,25V,+/-5%,0402", Catalog=陶瓷电容, Part Number=CC02012R0XX, Remark=NC
C68 C69: library part CC0302200XX, "C/C,22pF,25V,+/-5%,0603", Catalog=陶瓷电容, Part Number=CC0302200XX
CON1 CON4: library part CNBBM4000XX, "0.5mm ，BTB2*20Pin，SMT，公座，H3.0，DF12#(3.0)-40DS-0.5", Catalog=Connector, Part Number=CNBBM4000XX, PCB DECAL=CON20X2_0MM5_BTB_DF12_BOTTOM
CON2 CON3: library part CNBBM5000XX, "0.5mm ，BTB2*25Pin，SMT，公座，H3.0，DF12#(3.0)-50DS-0.5", Catalog=Connector, Part Number=CNBBM5000XX, PCB DECAL=CON25X2_0MM5_BTB_DF12
D1: library part DD32SCH04XX, "1N5819_SOD123_1MM7X3MM85", Part Number_AK=DD06SCH00XX, Catalog=二极管, CODE=82268, Part Number=DD32SCH04XX, PCB DECAL=1N5819_SOD123_1MM7X3MM85, Source_Path=E:\PROJECTS\JVS-H201\LIBRARY1.OLB
E1 E2: library part ED0314000XX, "PESD1608H140CR15GPT,0603", Catalog="ESD Protectors", Part Number=ED0314000XX, PCB DECAL=ESD0603, Remark=NC, ROOM=power, Source_Path=F:\PROJECTFILES\CADENCE\AK9802PLATFORM\AK98XX_MB_V0-0715.DSN
FB1: library part BE0503010XX, "BEAD,PZ2012U301-1R5TF,300R,100MHz,0805", Package=L0603, Catalog=贴片磁珠, Part Number=BE0503010XX, PCB DECAL=FB0603, Source_Path="D:\PROGRAM FILES\ORCAD\ORCAD_10.5\TOOLS\CAPTURE\LIBRARY\DISCRETE.OLB"
FB2 FB3 FB4 FB5 FB6 FB7 FB8 FB9: library part BE0306011XX, "BLM18BD601SN1, 600R@100MHz", Package=L0603, Catalog=贴片磁珠, Part Number=BE0306011XX, PCB DECAL=FB0603, Source_Path="D:\PROGRAM FILES\ORCAD\ORCAD_10.5\TOOLS\CAPTURE\LIBRARY\DISCRETE.OLB"
L1 L3: library part WL1C04R70XX, Part Number_AK=WL1C02R20XX, Catalog=贴片电感, Part Number=WL1C04R70XX, PCB DECAL=L_SWPA3012_3X3MM, Source_Path=E:\工作目录\ORCAD原理图库\ORCAD元件库\磁珠&电感.OLB
L2: library part WL1C04R70XX, "4.7uH,SWPA3012S4R7MT", Part Number_AK=WL1C02R20XX, Catalog=贴片电感, Part Number=WL1C04R70XX, PCB DECAL=L_SWPA3012_3X3MM, Source_Path=E:\工作目录\ORCAD原理图库\ORCAD元件库\磁珠&电感.OLB
M1 M2: library part MP4030941XX, "MIC, PDM digital output, MSM261D4030H1CPM ,4mm×3mm×1mm", Catalog=Microphone, Part Number=MP4030941XX
MIC1: library part MP6015380XX, "Pansonic MICROPHONE,∮6mm,H=2.7MM,38dB+/2dB,2pin直插件", Catalog=Microphone, Part Number=MP6015380XX
R1 R2 R3 R19: library part CR0304720XX, "Res,4.7K,1/10W,+/-5%,0603", Catalog=贴片电阻, Part Number=CR0304720XX
R4: library part CR0301010XX, "Res,100R,1/10W,+/-5%,0603", Catalog=贴片电阻, Part Number=CR0301010XX
R5 R8 R17: library part CR0301020XX, "Res,1K,1/10W,+/-5%,0603", Catalog=贴片电阻, Part Number=CR0301020XX
  R17: Remark=NC
R6 R7: library part CR0312010XX, "Res,1.2K,1/10W,+/-1%,0603", Catalog=贴片电阻, Part Number=CR0312010XX
R9 R15: library part CR0333R00XX, "Res,33R,1/10W,+/-1%,0603", Catalog=贴片电阻, Part Number=CR0333R00XX
R11 R12 R13 R39 R43: library part CR0500000XX, "Res,0R,1/8W,+/-5%,0805", Catalog=贴片电阻, Part Number=CR0500000XX
  R39: Remark=NC
R14 R16: library part CR0310020XX, "Res,10K,1/10W,+/-1%,0603", Catalog=贴片电阻, Part Number=CR0310020XX
R18 R20 R21 R22 R23 R24 R25 R26 R27 R28 R29 R30 R31 R32 R33 R34 R35 R36 R38: library part CR0300000XX, "Res,0R,1/10W,+/-5%,0603", Catalog=贴片电阻, Part Number=CR0300000XX
  R22 R24 R26 R27 R29 R31 R34 R36 R38: Remark=NC
R37: library part CR0303030XX, "Res,30K,1/10W,+/-5%,0603", Catalog=贴片电阻, Part Number=CR0303030XX
R40 R44 R46: library part CR0210030XX, "Res,100K,1/16W,+/-1%,0402", Catalog=贴片电阻, Part Number=CR0210030XX
R41: library part CR0201240XX, "Res,120K,1/16W,+/-1%,0402", Catalog=贴片电阻, Part Number=CR0201240XX
R42: library part CR0201140XX, "贴片电阻 通用 res，110k，1/16W,+/-1%,0402；", Catalog=贴片电阻, Part Number=CR0201140XX
R45: library part CR0220030XX, "Res,200K,1/16W,+/-1%,0402", Catalog=贴片电阻, Part Number=CR0220030XX
U1: library part 11111111110, "AK376xE_LQFP128_0MM4_16X16MM", Catalog=AK芯片, Part Number=11111111110
U2: library part JCSOPAP03XX, "IC：NOR Flash, Glga Device, GD25Q64ESIG, SOP8, 8MB, 3.3V", Catalog=集成电路, Part Number=JCSOPAP03XX, PCB DECAL=GDQ64BSIG_SOP8_1MM27_5X8MM
U3: library part JCDFNMC19XX, "SPI-NAND FLASH,GigaDevice,GD5F1GQ5UEYIG,1Gbit SLC NAND Flash,2.7~3.6V,WSON8.", Catalog=集成电路, Part Number=JCDFNMC19XX, PCB DECAL=GD5F1GQ4UAYIG_SOP8_1MM27_6X8MM, Source_Path=H:\SNOWBIRD-S\PLATFORM\SBS_LIB.OLB
U4 U5: library part JCSXTPW60XX, "PowerIC,PAM,PAM2312AABADJ,SOT23,5pin", Manufacturer #1=XICOR, Catalog=集成电路, Part Number=JCSXTPW60XX, PCB DECAL=PAM2312_SOT23-5, Sim.Analog.Order=Model$
X1: library part XR32K77S2XX, "32.768K,CL=12.5pF,20ppm,MC146", Catalog=晶振, Part Number=XR32K77S2XX, PCB DECAL=MC146
X2: library part XR24M00S4XX, Catalog=晶振, Part Number=XR24M00S4XX

## Via types
v1: diameter 15.75, hole 7.87, Top to Bottom, 582 vias
v2: diameter 20, hole 12, Top to Bottom, 53 vias
v3: diameter 24, hole 16, Top to Bottom, 1 vias

## Nets (pads, with @x,y where several pads share a name; then routed paths per layer and width w, separated by ;. In a path a pad name is that pad's centre, name@x,y a point inside that pad or via, vN(x,y) a via of type N, cw(c..) or ccw(c..) an arc to the next point about the centre after c; other vN are vias at no path point)
AGND: C13.2 C14.2 C15.2 C20.2 C21.2 C22.2 C41.2 C50.2 C65.2 C66.2 CON1.6 E1.2 E2.2 FB9.1 R8.1 U1.105 | length 1432.2
  Top w5: C50.2@1310,1696.5 1310,1697.79 v1(1310,1725) ; v1(1365,1725) C65.2@1365,1696.5 C66.2@1415,1696.5 v1(1415,1725) ; C21.2@1467.5,1916.5 C20.2@1517.5,1916.5 v1(1517.5,1942.5) ; C22.2@1617.5,1916.5 v1(1617.5,1942.5) ; C13.2@1626.5,1642.5 v1(1652.5,1642.5) C14.2@1678.5,1642.5 C15.2@1678.5,1692.5 ; R8.1@1736.5,1800 v1(1760,1800) ; E1.2@1740,1858.5 v1(1770,1858.5) ; E2.2@1740,1925 v1(1770,1925)
  Top w8: U1.105@1303.11,1372.09 1303.11,1402.11 1305,1404 1305,1590 v1(1295,1600) 1283,1612 1283,1670.79 C50.2@1310,1697.79 ; v1(1415,1725) 1440,1750 1440,1889 C21.2@1467.5,1916.5
  Top w9: v1(1270,1575) 1252.64,1592.36 1252.64,1595 1252.64,1730.14 1312.5,1790 v1(1332.64,1790) ; v2(1303.11,1325) U1.105@1303.11,1372.09
  Bottom w9: v1(1332.64,1790) CON1.6@1332.64,1882.12
  Bottom w12: CON1.6@1332.64,1882.12 v1(1332.64,1925)
  other v1: 1790.46,1649.94 2097.45,1656.49 1886.48,1657.94 2009.42,1657.94 1925.77,1740.88 2034.16,1756.15 1808.64,1769.98 2093.81,1793.98 2097.45,1923.47 1532.93,1990.4 1578.76,2005.68 1880.66,2007.86 1682.06,2010.04 2085.81,2030.41 1757.72,2042.78 1620.23,2051.51 1915.58,2052.96 2008.7,2052.96 1535.11,2063.88 1492.19,2064.6
AK_DM: CON1.40 U1.121 | length 532.9
  Top w6: v1(997,1842.5) 1002,1837.5 1002,1703 1051.14,1653.86 U1.121@1051.14,1372.09
  Bottom w5: CON1.40@997,1880 997.99,1880.99 CON1.40@997.99,1882.12
  Bottom w6: v1(997,1842.5) CON1.40@997,1880
AK_DP: CON1.38 U1.120 | length 535.4
  Top w6: v1(1018.5,1842.5) 1013,1837 1013,1708 1061.6,1659.4 1062.2,1658.8 1062.2,1409.63 1066.82,1405.01 U1.120@1066.89,1372.09
  Bottom w5: CON1.38@1017.68,1882.12 CON1.38@1018.5,1882.12
  Bottom w6: v1(1018.5,1842.5) CON1.38@1018.5,1882.13
AVCC11_MIPI_DSI: C3.1 C4.1 U1.108 | length 129.8
  Top w9: 1235,1452.5 1255.87,1431.63 v1(1255.87,1417.5) U1.108@1255.87,1372.09
  Bottom w15: 1235,1452.5 v1(1255.87,1417.5)
AVCC33_MIPI_DSI: C6.1 C7.1 C41.1 FB2.2 U1.107 | length 84.9
  Top w9: U1.107@1271.61,1372.09 1271.61,1409.11 1277.5,1415 v1(1277.5,1427.5) 1272.5,1432.5 C7.1@1272.5,1452.5
AVDD_PLL: C54.1 C55.1 FB6.2 U1.21 | length 177.4
  Top w9: v1(805,1030) C55.1@785,1030 C54.1@785,993 786.13,994.13 U1.21@877.91,994.13
  Bottom w15: v1(805,1030) FB6.2@832,1030
AVDD_USB: C60.1 C61.1 FB8.2 U1.119 | length 187.6
  Top w8.5: U1.119@1082.64,1372.09 v1(1082.64,1409)
  Top w9: v1(1082.64,1409) C61.1@1082.64,1455
  Bottom w12: v1(1082.64,1409) 1082.64,1451 C60.1@1082.64,1461
  Bottom w15: FB8.2@1030,1461 C60.1@1082.64,1461
CSI0_I2C_SCL: CON2.36 U1.85 | length 525.9
  Top w5: U1.85@1492.09,1135.87 1558.37,1135.87 1578,1155.5 1895.46,1155.5 1903.39,1163.43 v1(1965,1163.43)
  Bottom w5: CON2.36@1923.38,1163.43 v1(1965,1163.43)
CSI0_I2C_SDA: CON2.35 U1.84 | length 591.2
  Top w5: U1.84@1492.09,1120.12 1559.98,1119.98 1585.5,1145.5 1977.55,1145.5 1995,1163.43 v1(2005,1163.43)
  Bottom w5: v1(2005,1163.43) CON2.35@2065.12,1163.43
CSI0_PCLK: CON2.38 U1.87 | length 437.8
  Top w5: U1.87@1492.09,1167.36 1554.86,1167.36 1570.61,1183.11 v1(1860,1183.11)
  Bottom w5: v1(1860,1183.11) CON2.38@1923.38,1183.11
CSI0_PDWN: CON2.33 R36.1 | length 177.1
  Top w5: R36.1@2075,1019 2075,1113.74 v1(2105,1143.74)
  Bottom w5: CON2.33@2065.12,1143.74 v1(2105,1143.74)
CSI0_RSET: CON2.34 R34.1 | length 1413.2
  Top w5: R34.1@1580,399 1596,415 2095,415 2110,430 2110,785 v1(2097.5,797.5)
  Bottom w5: CON2.34@1923.38,1143.74 1983.76,1143.74 1995,1132.5 1995,825 2012.5,807.5 2087.5,807.5 v1(2097.5,797.5)
CSI0_SCLK: CON2.37 U1.86 | length 586.1
  Top w5: U1.86@1492.09,1151.61 1556.61,1151.61 1571.5,1166.5 1876.5,1166.5 1893.11,1183.11 v1(2025,1183.11)
  Bottom w5: v1(2025,1183.11) CON2.37@2065.12,1183.11
DDR: C74.1 C75.1 C76.1 L3.2 R43.2 R45.2 | length 769
  Bottom w5: C74.1@1668,294.72 C74.1@1673,295 ; L3.2@1770,294.72 1807.78,294.72 1850,252.5 C76.1@1892.5,252.5 R45.2@1892.5,212.5
  Bottom w30: R43.2@1183.5,496 1565.5,496 1676.5,385 C75.1@1676.5,340
EMMC_CLK: CON2.21 U1.77 | length 579.6
  Top w5: U1.77@1492.09,1009.88 1525,1009.88 1530.12,1015 2004.37,1015 v1(2015,1025.63)
  Bottom w5: v1(2015,1025.63) CON2.21@2065.12,1025.63
EMMC_CMD: CON2.18 U1.75 | length 525
  Top w5: U1.75@1492.09,978.39 1523.39,978.39 1540,995 1956.26,995 v1(1965,986.26)
  Bottom w5: CON2.18@1923.38,986.26 v1(1965,986.26)
EMMC_D0/I2S0_BCLK: CON2.24 U1.81 | length 442.7
  Top w5: U1.81@1492.09,1072.87 1702.13,1072.87 v1(1715,1060)
  Bottom w5: v1(1715,1060) 1729.69,1045.31 CON2.24@1923.38,1045.31
EMMC_D1/I2S0_LRCLK: CON2.22 U1.80 | length 444.9
  Top w5: U1.80@1492.09,1057.13 1492.09,1057.5 v1(1690,1057.5)
  Bottom w5: v1(1690,1057.5) 1690.63,1057.5 1722.5,1025.63 CON2.22@1923.38,1025.63
EMMC_D2: CON2.15 U1.72 | length 596
  Top w5: U1.72@1492.09,931.14 1526.14,931.14 1555,960 1865,960 1875,950 1895,950 1900,955 1987.5,955 1999.07,966.57 v1(2025,966.57)
  Bottom w5: v1(2025,966.57) CON2.15@2065.12,966.57
EMMC_D3: CON2.16 U1.73 | length 444.4
  Top w5: U1.73@1492.09,946.89 1526.89,946.89 1552.5,972.5 1879.07,972.5 v1(1885,966.57)
  Bottom w5: v1(1885,966.57) CON2.16@1923.38,966.57
EMMC_D4: CON2.17 U1.74 | length 595.2
  Top w5: U1.74@1492.09,962.64 1522.64,962.64 1545,985 1940,985 1955,970 1973.74,970 1990,986.26 v1(2015,986.26)
  Bottom w5: v1(2015,986.26) CON2.17@2065.12,986.26
EMMC_D5: CON2.19 U1.76 | length 577.9
  Top w5: U1.76@1492.09,994.13 1524.13,994.13 1535,1005 2024.06,1005 v1(2025,1005.94)
  Bottom w5: v1(2025,1005.94) CON2.19@2065.12,1005.94
EMMC_D6: CON2.20 U1.78 | length 564.5
  Top w5: U1.78@1492.09,1025.63 1965.63,1025.63 v1(1975,1035)
  Bottom w5: CON2.20@1923.38,1005.94 1970,1005.94 1975,1010.94 v1(1975,1035)
EMMC_D7/I2S0_DIN: CON2.23 U1.79 | length 583.8
  Top w5: U1.79@1492.09,1041.38 1528.62,1041.38 1532.5,1037.5 1952.5,1037.5 1967.5,1052.5 1997.5,1052.5 2004.69,1045.31 v1(2025,1045.31)
  Bottom w5: v1(2025,1045.31) CON2.23@2065.12,1045.31
GND: C1.2 C2.1 C3.2 C4.2 C5.2 C6.2 C7.2 C8.2 C9.2 C10.2 C11.2 C12.2 C23.1 C24.1 C25.2 C26.1 C27.1 C28.2 C29.1 C30.2 C31.2 C32.1 C33.2 C34.2 C35.1 C36.1 C37.1 C38.2 C39.2 C40.1 C42.2 C43.2 C44.2 C45.2 C46.2 C47.2 C49.2 C51.2 C52.2 C53.2 C54.2 C55.2 C56.2 C57.2 C58.2 C59.2 C60.2 C61.2 C63.2 C64.2 C67.2 C68.2 C69.2 C70.2 C71.2 C72.2 C73.2 C74.2 C75.2 C77.2 C78.2 C79.2 C80.2 C81.2 C82.2 CON1.3 CON1.9 CON1.12 CON1.17 CON1.18 CON1.23 CON1.24 CON1.29 CON1.30 CON1.35 CON1.36 CON2.7 CON2.13 CON2.14 CON2.27 CON2.28 CON2.42 CON2.45 CON3.5 CON3.6 CON3.31 CON3.32 CON3.43 CON3.44 CON4.11 CON4.12 CON4.13 CON4.20 CON4.21 CON4.24 CON4.31 CON4.32 FB9.2 M1.5 M1.6 M1.7 M1.8 M2.2 M2.5 M2.6 M2.7 M2.8 R16.1 R42.1 R46.1 U1.129 U2.4 U3.4 U4.2 U5.2 X1.3 X2.2 X2.4 | length 5624.2
  Top w5: v1(480,120) C11.2@511,120 C12.2@511,175 v1(482.5,175) ; v1(495,2050) C70.2@495,2024 C1.2@545,2024 v1(545,2050) ; v1(539,1027.5) C59.2@539,1052 v1(565,1052) ; C8.2@569,287.5 v1(597.5,287.5) ; v1(590,1040) C67.2@610,1040 ; v1(592.5,1070) v1(619,1070) v1(645,1070) ; U3.4@645,1578 v1(675,1578) ; M2.8@708.72,198.23 v1(708.72,215) ; v1(722.5,993) C54.2@745,993 C55.2@745,1030 745,1067 745,1104.37 ; v1(727.5,874) C58.2@727.5,892.5 ; v1(727.5,911) C57.2@727.5,930 ; M2.5@776.63,150 v1(792.5,150) ; v1(970,512.5) v1(970,587.5) v1(970,682.5) ; v1(1082.42,1600.82) v1(1082.42,1647) ; C61.2@1082.64,1495 v1(1082.64,1545) ; v1(1099,509) v1(1099,425) v1(1099,373) 1098.66,372.66 1098.66,364 v1(1175.16,287.5) ; v1(1135,935) v2(1250,935) ; v1(1235,1517) 1235,1492.5 1273,1492.5 v1(1273,1517) ; v1(1318.78,387.71) v1(1318.78,557.5) ; 1390,1505 1427,1505 C72.2@1465,1505 ; C69.2@1425,639 v1(1425,665) ; v1(1612.5,655) C68.2@1584,655 v1(1584,630) v1(1584,597.5) v1(1617.5,597.5) v1(1665,597.5) ; C42.2@1629,850 C43.2@1629,800 v1(1655,800) ; v1(1662.09,105) M1.7@1662.09,150 ; v1(1696,792) C46.2@1721,792 v1(1721,760) C36.1@1721,725 v1(1721,698) ; v1(1730,80) M1.6@1730,101.77 ; M1.8@1730,198.23 v1(1730,215) ; v1(1797.91,110) M1.5@1797.91,150
  Inner Layer 3 w5: v2(1250,935) v2(1320,935)
  Bottom w5: v1(265,1005.94) CON3.31@304.88,1005.94 v1(345,1005.94) ; CON3.5@304.88,1261.85 v1(342.5,1261.85) ; v1(402.5,880.33) 410,887.83 CON3.44@446.62,887.83 ; v1(407.5,1005.94) CON3.32@446.62,1005.94 ; v1(407.5,1261.85) CON3.6@446.62,1261.85 ; v1(495,1420) C2.1@495,1451 ; v1(619,1070) C37.1@619,1110 ; U2.4@645,1843.86 v1(675,1843.86) ; 745,1067 v1(745,1086) ; C53.2@832,1096 v1(832,1125) ; v1(925,1325) C29.1@951,1325 v1(951,1300) ; C40.1@970,1461 v1(997.5,1461) ; CON1.36@1037.36,1882.12 v1(1037.36,1925) ; v1(1037.36,1985) CON1.35@1037.36,2023.86 v1(1037.36,2067.5) ; C60.2@1082.64,1519 v1(1082.64,1545) ; CON1.30@1096.42,1882.12 v1(1096.42,1929.5) ; v1(1096.42,1985) CON1.29@1096.42,2023.86 v1(1096.42,2065) ; v1(1099,680) C24.1@1126,680 C26.1@1126,630 ; R16.1@1126,745 C32.1@1126,795 v1(1126,832) ; CON1.24@1155.47,1882.12 v1(1155.47,1925) ; v1(1155.47,1985) CON1.23@1155.47,2023.86 v1(1155.47,2065) ; CON4.11@1175,106.14 CON4.11@1175.16,106.14 v1(1175.16,60) ; CON4.12@1175.16,247.88 v1(1175.16,287.5) ; v1(1194.84,60) CON4.13@1194.84,106.14 ; CON1.18@1214.53,1882.12 v1(1214.53,1925) ; v1(1214.53,1985) CON1.17@1214.53,2023.86 v1(1214.53,2070) ; 1235,1492.5 v1(1235,1517) ; CON4.20@1253.9,247.88 v1(1253.9,287.5) ; v1(1273.58,60) v1(1273.58,162.5) 1273.58,171.08 1293.27,190.77 v1(1293.27,287.5) ; CON1.12@1273.58,1882.12 v1(1273.58,1925) ; v1(1293.27,1985) CON1.9@1293.27,2023.86 v1(1293.27,2070) ; v1(1294,830) C64.2@1294,855 v1(1317.5,855) ; v1(1319,630) C27.1@1294,630 C23.1@1294,680 v1(1319,680) ; v1(1335,970) C35.1@1365,970 v1(1365,939) ; v1(1352.32,1982.5) CON1.3@1352.32,2023.86 v1(1352.32,2067.5) ; v1(1372.01,60) CON4.31@1372.01,106.14 ; v1(1372.01,192.5) CON4.32@1372.01,247.88 ; v1(1471,1534) C56.2@1471,1508 v1(1495,1508) ; C51.2@1480,736 1505,736 ; v2(1505,705) 1505,736 ; C52.2@1530,736 1505,736 ; v1(1607.5,295) C74.2@1633,295 v1(1633,272.5) ; v1(1618.5,314.5) C75.2@1618.5,340 ; C10.2@1700,191.5 C9.2@1756,191.5 ; v1(1700,253.16) v1(1786.61,253.16) ; C45.2@1724.72,645 v1(1724.72,671) ; v1(1842.5,340) U5.2@1870,340 v1(1900,340) ; v1(1850,940) 1868.11,940 1875,946.89 CON2.14@1923.38,946.89 1968.11,946.89 v1(1977.5,937.5) ; U4.2@1870,485 v1(1897.5,485) v1(1920,485) ; v1(1882.5,1084.69) CON2.28@1923.38,1084.69 ; CON2.42@1923.38,1222.48 1964.52,1222.48 v1(1972.5,1214.5) ; R46.1@1971.97,212.5 v1(2000,212.5) C73.2@2025,212.5 C79.2@2065,212.5 ; R42.1@1980,610 v1(1980,630) ; v1(2013,946.89) CON2.13@2065.12,946.89 ; v1(2015,887.83) CON2.7@2065.12,887.83 v1(2105,887.83) ; v1(2025,1261.85) CON2.45@2065.12,1261.85 v1(2107.5,1261.85) ; v1(2065,545) C49.2@2065,522.4 C71.2@2065,485 v1(2065,465) C77.2@2065,415 C78.2@2065,377.4 v1(2085,377.4) ; CON2.27@2065.12,1084.69 v1(2105,1084.68)
  Bottom w12: v1(265,887.83) CON3.43@304.88,887.83 ; CON3.44@446.62,887.83 v1(488,887.83)
  other v1: 1490.48,52.27 770.22,53.28 1571,54.29 546.18,59.75 1636.15,68.33 1775,70 418.81,73.76 1978.02,73.16 2085.51,76.36 284.45,103.29 770,110 1604.21,116.69 364.64,126.79 1951.42,132.76 1630.88,143.86 1894.99,146.88 1050.88,148.82 615,150 1843.11,152.84 2018.66,156.17 960.94,160.73 1076.94,164.77 2101.07,165.41 1147.94,168.03 424.71,188.93 1050.02,191.52 1838.72,210.95 1596.68,214.02 2102.23,213.55 614.33,231.18 454.17,236.98 1635.49,248.99 976.73,263.12 807.5,267.5 1568.78,267.75 927.83,269.23 728.71,284.05 1535.82,287.61 782.34,305.34 422.77,310.34 648.9,313.03 1919.18,325.66 367.13,338.06 1974.94,346.93 494.43,364.21 718.63,365.01 639.78,366.8 779.78,367.78 1209.7,421.68 354.92,424.65 604.85,429.6 1184.98,439.35 274.11,441.41 494.57,441.44 782.03,454.7 699.02,460.21 1245,462.5 1669.05,468.09 1977.19,484.91 1638.02,505.65 656.07,516.88 1601.63,540.24 420.28,541.81 1668.15,545.19 1245,557.5 498.1,559.88 767.26,569.87 1227.5,592.5 1250,592.5 2068.15,595.91 473.44,614.16 718.09,617.24 590.08,631.88 297.74,646.64 396.72,667.98 1840,670 1065.44,681.21 728.87,687.99 2063.76,687.77 794.77,688.28 1830.51,716.65 815.99,729.33 523.64,730.8 2057.2,735.7 1834.08,757.5 841.09,761.81 275.59,779.53 478.02,787.32 1675,791 525.3,792.22 690.77,794.9 386.83,796.05 734.48,795.79 339.3,798.52 1046.42,812.01 965,822.5 1397.55,823.03 1629,825 1207.5,827.5 1152.23,831.89 1832.5,837.5 952.5,853.39 998.99,855.72 801.38,865.81 535.56,866.71 1367.11,870.08 670,880 815.2,903.72 965.98,906.16 535.11,930.04 537.79,996.94 969.7,1002.71 1041.42,1026.5 1429.36,1076.62 1003.64,1101.62 254.86,1102.48 1348.62,1114.21 1605,1115 1640,1115 1376.36,1156.13 930.37,1160.24 2117.5,1172.5 942.08,1189.28 255.64,1193.87 971.57,1218.07 1312.41,1250.96 1389.39,1251.29 1100.74,1253.87 378.47,1256.07 1247.66,1255.59 1176.96,1258.56 941.38,1265.81 997.54,1270.02 1160.42,1301.61 1234.77,1302.83 1084.6,1303.72 1381.79,1309.77 374.93,1318.21 507.5,1320 2032.28,1327.8 627.27,1331.24 707.12,1331.24 822.83,1342.24 1715.58,1359.95 1837.99,1360.18 880.27,1368.72 1597.14,1369.18 1881.55,1371.74 1490.11,1372.44 635.22,1374.58 299.59,1375.99 585.36,1376.51 518.12,1378.45 692.13,1381.06 2101.97,1390.51 1830.21,1401.24 418.02,1408.98 1621.59,1415.91 268.43,1416.25 567.17,1417.23 622.67,1418.07 776.39,1428.05 1487.5,1437.5 319.58,1439.97 1999.71,1442.53 2096.55,1446.35 376.72,1454.89 1907.5,1480 282.09,1482.69 894.86,1490.48 1509,1491 1816.08,1494.14 391.44,1502.01 821.47,1508.95 1736.09,1516.47 2044.26,1518.04 2095,1525 341.83,1527.18 1664.55,1528.26 1448,1531 1520.81,1537.4 1388.54,1540.9 1597.33,1546.34 1551.4,1549.28 446.09,1560.81 268.28,1564.85 393.53,1564.16 1415.31,1565.14 1451.14,1566.83 1674.84,1567.21 1494.03,1568.52 1784.14,1568.2 1628.23,1572.83 1732.26,1574.29 1837.01,1574.29 2077.08,1574.29 1233.23,1576.82 758.35,1578.75 1577.51,1584.23 1520,1592 1010.33,1599.27 308.33,1604.57 445.96,1605.15 846.11,1608.51 1233.14,1611.79 793.26,1639.23 450.84,1645.03 381.39,1648.21 1233.17,1648.23 1014.48,1650.56 948.23,1655.21 327.48,1656.35 863.94,1671.58 1232.98,1677.01 668.72,1679.21 1080,1685 761.43,1694.21 379.52,1705.19 504.56,1705.66 1232.97,1707.65 1060,1710 434.81,1713.06 925.64,1712.91 979.96,1726.08 286.17,1728.78 1040.5,1730 854.32,1739.38 799.84,1763.23 963.63,1765.04 669.89,1766.69 981.78,1770.64 621.49,1773.1 465.84,1777.4 742.44,1788.13 893.89,1788.98 1077.5,1790 1135,1790 1190,1792.5 1245.73,1792.86 327.48,1807.05 400.84,1812.87 980.98,1812.33 804.64,1829.12 942.4,1831.69 971.57,1852.39 859.77,1857.73 912.46,1863.86 741.22,1873 299.58,1875.74 808.83,1890.81 367.9,1891.46 871.73,1918.37 752.52,1927.95 278.87,1934.64 437.55,1935.23 804.99,1938.56 365.25,1952.46 1127.85,1952.5 1029.18,1955.25 991.21,1957.12 1305.05,1956.56 1243.85,1957.68 1078.79,1958.25 1179.29,1958.25 725.95,1970.89 876.83,1972.69 817.82,1984.86 302.18,1999.99 438.83,2003.19 1411.44,2024.39 361.14,2035.64 421.01,2057.58 675.25,2062.13 772.81,2063.23 895.2,2063.23 1407.84,2064.53 310.13,2067.67 849.56,2070.52 967.57,2070.52
  other v2: 1885.6,88.57 2047.09,111.91 1950,162.5 1913.06,364.52 1917.63,516.61 1025,945 1085,970 1145,970 1220,970 1280,970 1110,1000 1085,1030 1145,1030 1220,1030 1280,1030 1105,1100 1145,1100 1185,1100 1225,1100 1265,1100 1085,1125 1125,1125 1165,1125 1205,1125 1245,1125 1285,1125 1085,1165 1125,1165 1165,1165 1205,1165 1245,1165 1285,1165 1302.5,1292.5
GPIO32: R18.2 U1.71 | length 904.1
  Top w5: v1(1464,699) 1447.5,715.5 1447.5,907.89 1455,915.39 U1.71@1492.09,915.39
  Bottom w5: R18.2@1051.5,445 1051.5,510 1076.5,535 1445,535 1464,554 v1(1464,699)
GPIO40: R25.2 R26.2 U1.8 | length 522.6
  Top w5: R26.2@362.5,1181.5 R25.2@412.5,1181.5 429.86,1198.86 U1.8@877.91,1198.86
GPIO54: R20.2 R27.2 U1.28 | length 490.4
  Top w5: v1(644,854.33) 644,840.25 669.29,814.96 777.46,814.96 846.4,883.9 U1.28@877.91,883.9
  Bottom w5: R20.2@644,675 615,704 615,799.78 R27.2@644,828.78 v1(644,854.33)
GPIO55: R28.2 R38.2 U1.29 | length 322.5
  Top w5: v1(670,775) 752.5,775 845.65,868.15 U1.29@877.91,868.15
  Bottom w5: R28.2@644,725 R38.2@644,775 v1(670,775)
GPIO83: R33.2 R34.2 U1.59 | length 594
  Top w5: U1.59@1350.35,757.91 1350.35,722.15 1355,717.5 1355,428.65 R33.2@1380,399 1414,365 1556,365 R34.2@1580,341
GPIO84: R35.2 R36.2 U1.60 | length 1665.7
  Top w5: U1.60@1366.1,757.91 1366.1,462.9 R35.2@1430,399 1454,375 1600,375 1627.5,402.5 2102.5,402.5 2122.5,422.5 2122.5,913.5 R36.2@2075,961
GPIO85: R21.2 R22.2 U1.61 | length 444.1
  Top w5: U1.61@1381.85,757.91 1381.85,473.15 1404,451 R21.2@1480,451 R22.2@1480,399
GPIO86: R23.2 R24.2 U1.62 | length 465.5
  Top w5: U1.62@1397.6,757.91 1397.6,495 1417.6,475 1506,475 R23.2@1530,451 R24.2@1530,399
HPOUT: CON1.4 U1.106 | length 579.1
  Top w5: U1.106@1287.36,1372.09 1287.48,1404.98 1293.5,1411 1293.5,1576.5 1270,1600 1270,1721.5 1298.5,1750 v1(1320,1750)
  Bottom w5: v1(1320,1750) 1337.32,1750 1352.32,1765 CON1.4@1352.32,1882.12
I2S0_DOUT: CON2.26 U1.83 | length 613.8
  Top w5: U1.83@1492.09,1104.37 1561.87,1104.37 1592.5,1135 1970,1135 v1(1977.5,1127.5)
  Bottom w5: CON2.26@1923.38,1065 1960,1065 1985,1090 1985,1120 v1(1977.5,1127.5)
I2S0_MCLK: CON2.25 U1.82 | length 582.8
  Top w5: U1.82@1492.09,1088.62 1713.88,1088.62 1737.5,1065 v1(2015,1065)
  Bottom w5: v1(2015,1065) CON2.25@2065.12,1065
I2S_I2C_SCL: CON3.50 R27.1 | length 139.4
  Bottom w5: CON3.50@446.62,828.78 585.5,828.78 R27.1@586,828.78
I2S_I2C_SDA: CON3.49 R38.1 | length 400.9
  Bottom w5: CON3.49@304.88,828.78 305,828.66 305,740 325,720 445,720 500,775 R38.1@586,775
I2S_RST: CON3.47 U1.3 | length 1059.8
  Top w5: v1(260,848.46) 247.5,860.96 247.5,932.5 287.5,972.5 287.5,1232.5 332.6,1277.6 U1.3@877.91,1277.6
  Bottom w5: v1(260,848.46) CON3.47@304.88,848.46
JTAG_RCLK: CON4.4 U1.26 | length 868.8
  Top w5: U1.26@877.91,915.39 v1(920,915.39)
  Bottom w5: v1(920,915.39) 912.5,907.89 912.5,350 945,317.5 1081.42,317.5 1096.42,302.5 CON4.4@1096.42,247.88
JTAG_RSTN: CON4.2 U1.18 | length 1021.1
  Top w5: U1.18@877.91,1041.38 v1(940,1041.38)
  Bottom w5: v1(940,1041.38) 940,977.5 900,937.5 900,342.5 937.5,305 1066.73,305 1076.73,295 CON4.2@1076.73,247.88
JTAG_TCLK: CON4.3 U1.25 | length 1121.4
  Top w5: v1(835,925) 841.14,931.14 U1.25@877.91,931.14
  Bottom w5: v1(835,925) 850,925 875,900 875,187.5 1000,62.5 1090,62.5 1096.42,68.92 CON4.3@1096.42,106.14
JTAG_TDI: CON4.1 U1.19 | length 1117.2
  Top w5: U1.19@877.91,1025.63 v1(922.5,1025.63)
  Bottom w5: v1(922.5,1025.63) 922.5,982.5 887.5,947.5 887.5,192.5 973.86,106.14 CON4.1@1076.73,106.14